# EAGLE board 13465-Spectacle_Motion_Board-panel.v10 (EAGLE 7.5.0), part 1 of 3
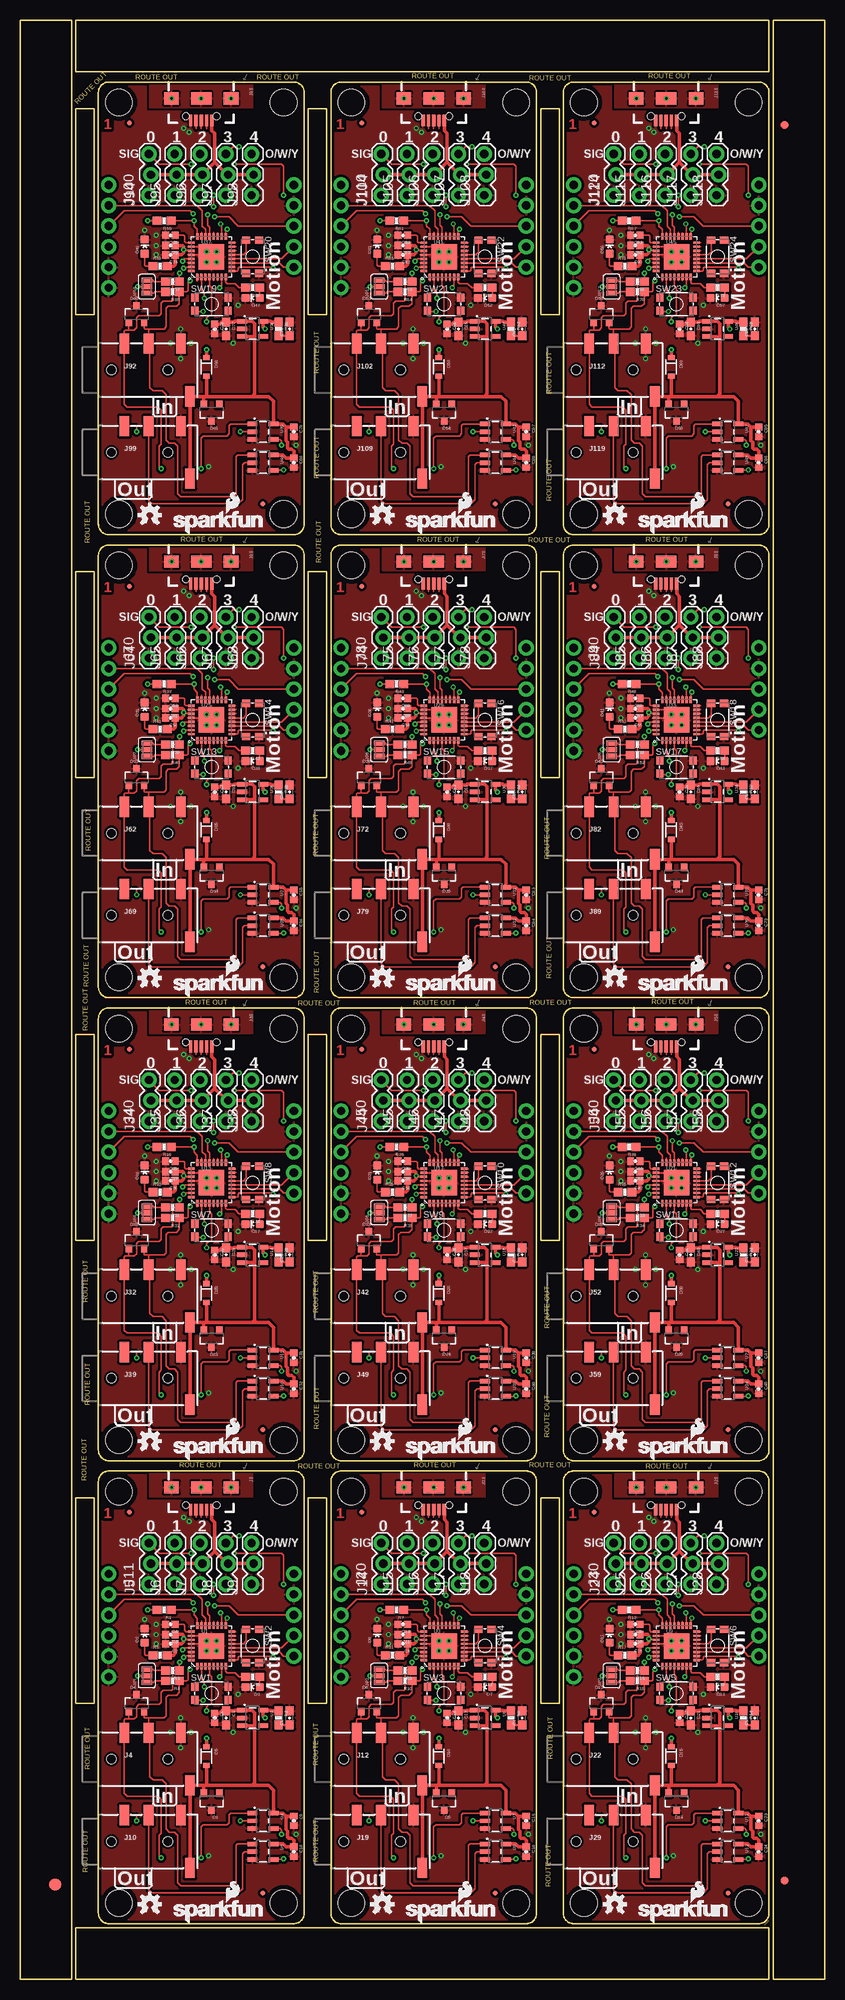
[diagram p0: board, top side]
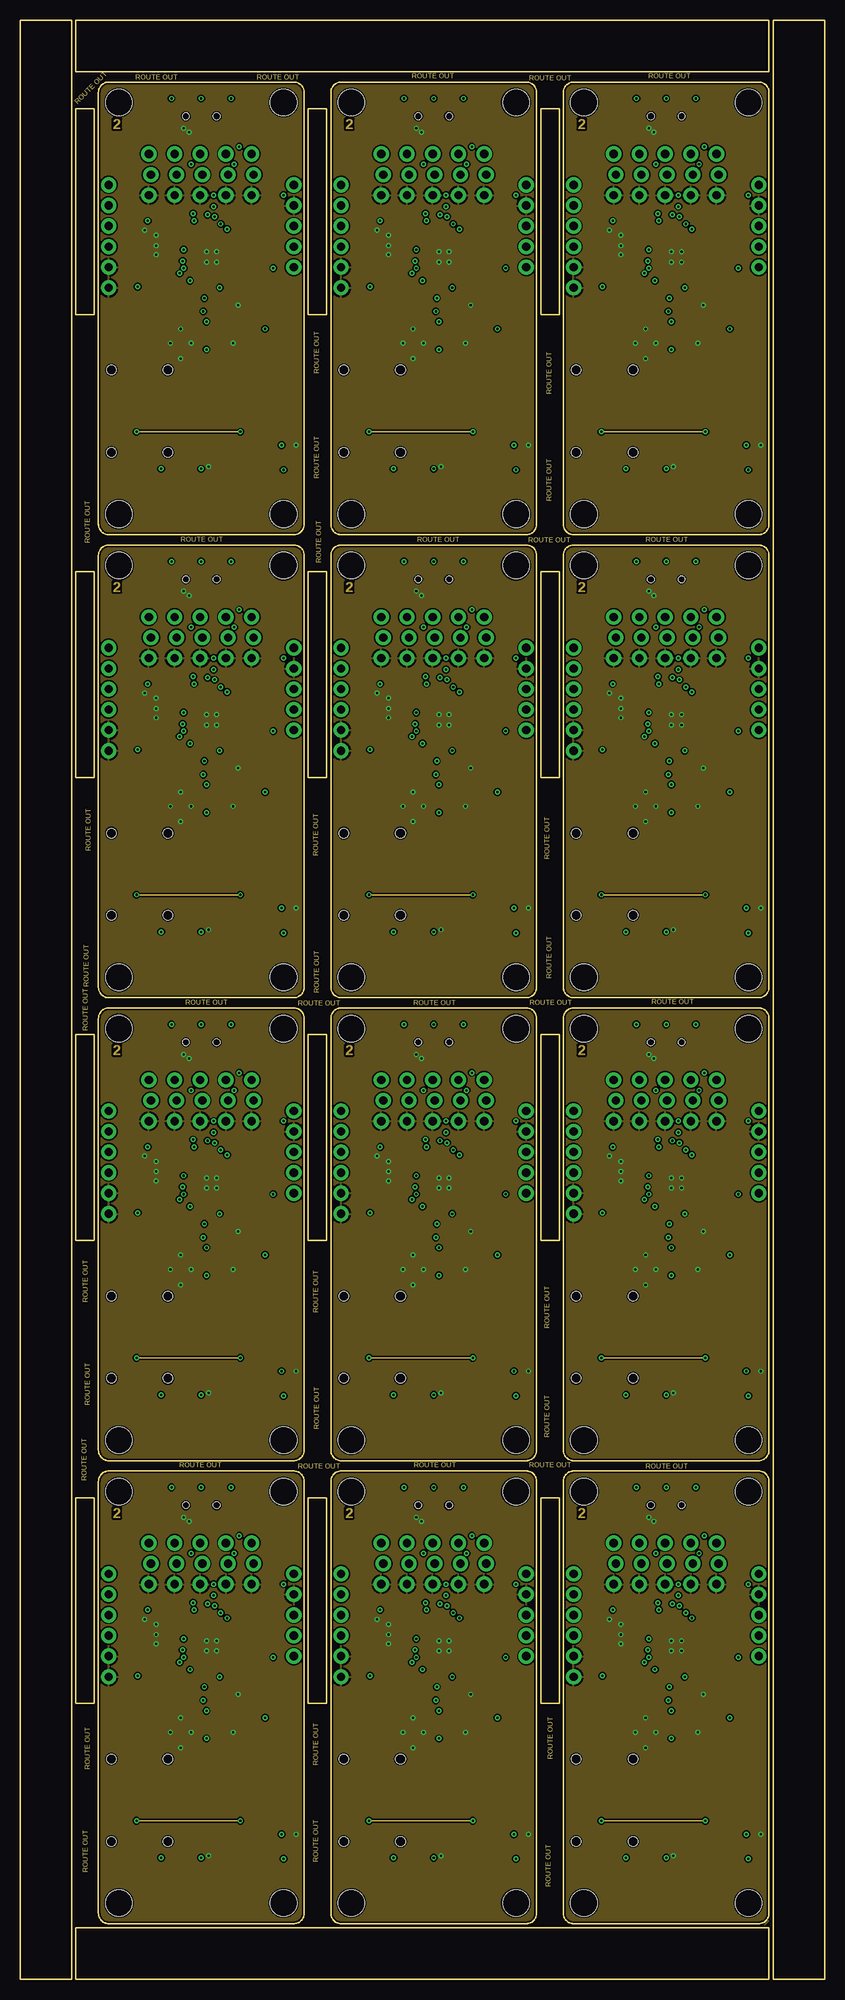
[diagram p1: board, inner layer Route2]
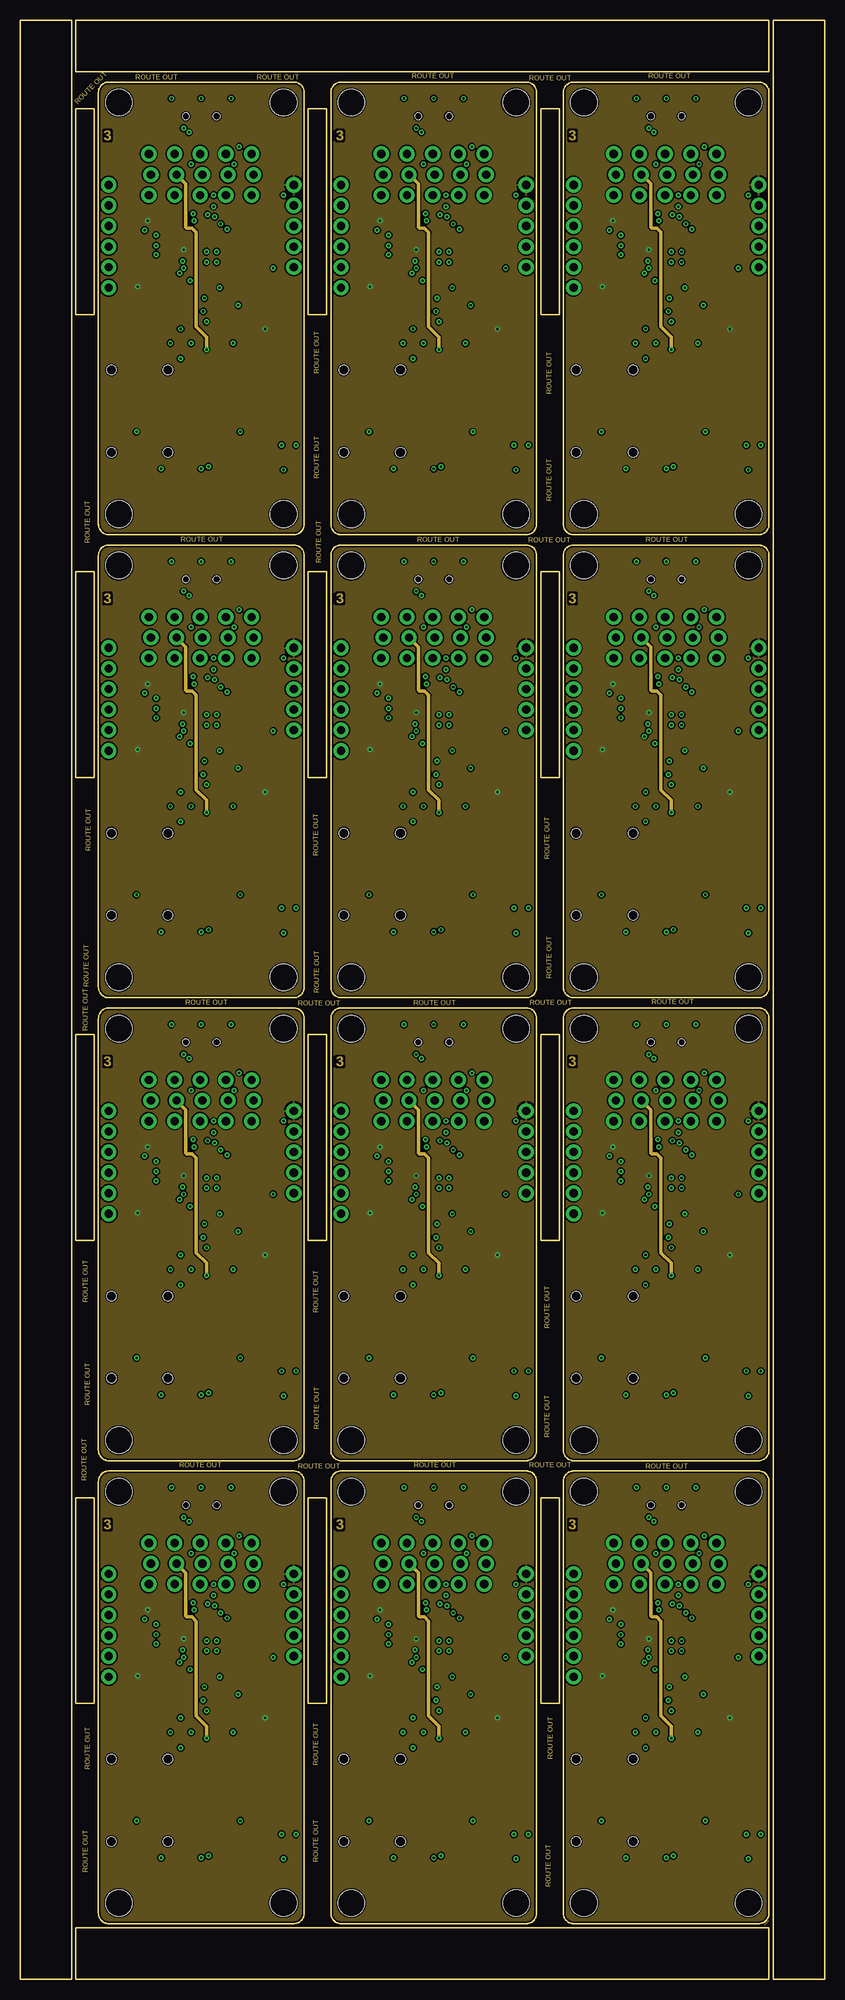
[diagram p2: board, inner layer Route15]
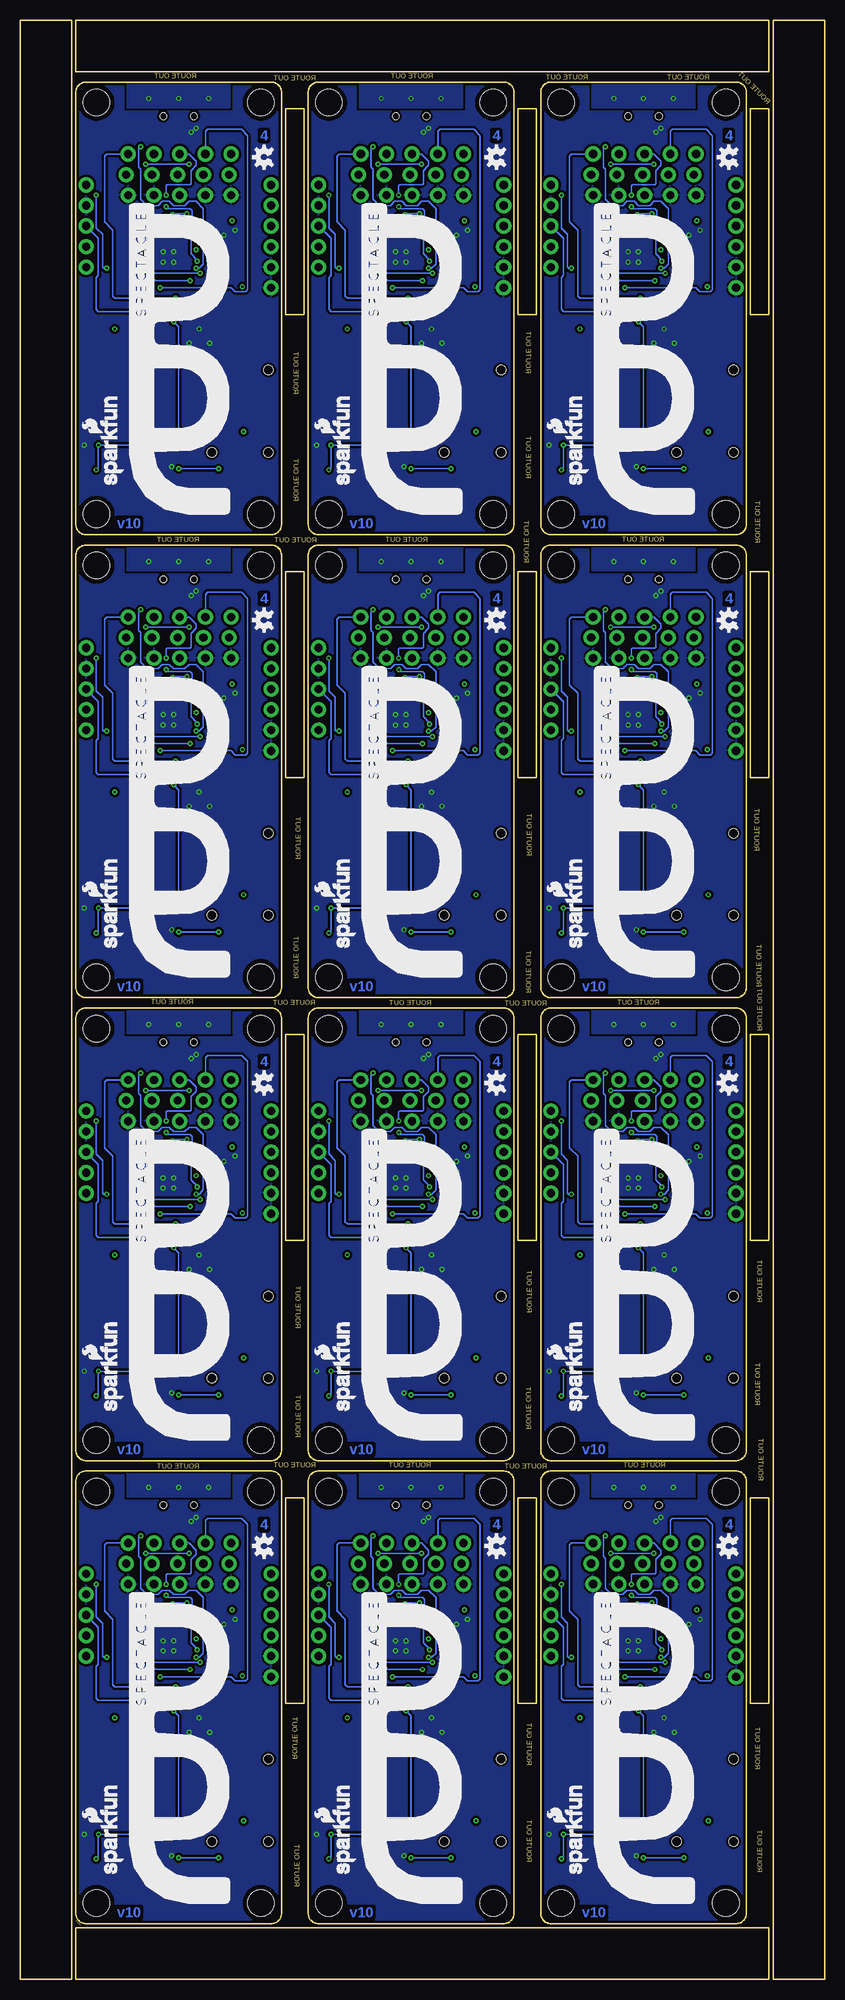
[diagram p3: board, bottom side, seen from below]

Size 99.31 x 241.81 mm. Coordinates in mm from the lower left corner, seen from the top.
Outline: 6.35,76.45 6.35,0 0,0 0,26.92
Outline: 0,24.38 0,241.81 6.35,241.81 6.35,73.91
Outline: 79.25,0 6.86,0 6.86,6.35 29.72,6.35
Outline: 27.18,6.35 92.46,6.35 92.46,0 76.71,0
Outline: 20.07,241.81 92.46,241.81 92.46,235.46 69.6,235.46
Outline: 72.14,235.46 6.86,235.46 6.86,241.81 22.61,241.81
Outline: 92.96,169.42 92.96,241.81 99.31,241.81 99.31,218.95
Outline: 99.31,221.49 99.31,0 92.96,0 92.96,171.96
Outline: 33.78,6.86 10.92,6.86 arc-90 9.65,8.13 9.65,61.47 arc-90 10.92,62.74 33.78,62.74 arc-90 35.05,61.47 35.05,8.13 arc-90 33.78,6.86
Outline: 9.14,34.04 9.14,59.44 6.86,59.44 6.86,34.04 9.14,34.04
Outline: 62.48,6.86 39.62,6.86 arc-90 38.35,8.13 38.35,61.47 arc-90 39.62,62.74 62.48,62.74 arc-90 63.75,61.47 63.75,8.13 arc-90 62.48,6.86
Outline: 37.85,34.04 37.85,59.44 35.56,59.44 35.56,34.04 37.85,34.04
Outline: 91.19,6.86 68.33,6.86 arc-90 67.06,8.13 67.06,61.47 arc-90 68.33,62.74 91.19,62.74 arc-90 92.46,61.47 92.46,8.13 arc-90 91.19,6.86
Outline: 66.55,34.04 66.55,59.44 64.26,59.44 64.26,34.04 66.55,34.04
Outline: 33.78,64.01 10.92,64.01 arc-90 9.65,65.28 9.65,118.62 arc-90 10.92,119.89 33.78,119.89 arc-90 35.05,118.62 35.05,65.28 arc-90 33.78,64.01
Outline: 9.14,91.19 9.14,116.59 6.86,116.59 6.86,91.19 9.14,91.19
Outline: 62.48,64.01 39.62,64.01 arc-90 38.35,65.28 38.35,118.62 arc-90 39.62,119.89 62.48,119.89 arc-90 63.75,118.62 63.75,65.28 arc-90 62.48,64.01
Outline: 37.85,91.19 37.85,116.59 35.56,116.59 35.56,91.19 37.85,91.19
Outline: 91.19,64.01 68.33,64.01 arc-90 67.06,65.28 67.06,118.62 arc-90 68.33,119.89 91.19,119.89 arc-90 92.46,118.62 92.46,65.28 arc-90 91.19,64.01
Outline: 66.55,91.19 66.55,116.59 64.26,116.59 64.26,91.19 66.55,91.19
Outline: 33.78,121.16 10.92,121.16 arc-90 9.65,122.43 9.65,175.77 arc-90 10.92,177.04 33.78,177.04 arc-90 35.05,175.77 35.05,122.43 arc-90 33.78,121.16
Outline: 9.14,148.34 9.14,173.74 6.86,173.74 6.86,148.34 9.14,148.34
Outline: 62.48,121.16 39.62,121.16 arc-90 38.35,122.43 38.35,175.77 arc-90 39.62,177.04 62.48,177.04 arc-90 63.75,175.77 63.75,122.43 arc-90 62.48,121.16
Outline: 37.85,148.34 37.85,173.74 35.56,173.74 35.56,148.34 37.85,148.34
Outline: 91.19,121.16 68.33,121.16 arc-90 67.06,122.43 67.06,175.77 arc-90 68.33,177.04 91.19,177.04 arc-90 92.46,175.77 92.46,122.43 arc-90 91.19,121.16
Outline: 66.55,148.34 66.55,173.74 64.26,173.74 64.26,148.34 66.55,148.34
Outline: 33.78,178.31 10.92,178.31 arc-90 9.65,179.58 9.65,232.92 arc-90 10.92,234.19 33.78,234.19 arc-90 35.05,232.92 35.05,179.58 arc-90 33.78,178.31
Outline: 9.14,205.49 9.14,230.89 6.86,230.89 6.86,205.49 9.14,205.49
Outline: 62.48,178.31 39.62,178.31 arc-90 38.35,179.58 38.35,232.92 arc-90 39.62,234.19 62.48,234.19 arc-90 63.75,232.92 63.75,179.58 arc-90 62.48,178.31
Outline: 37.85,205.49 37.85,230.89 35.56,230.89 35.56,205.49 37.85,205.49
Outline: 91.19,178.31 68.33,178.31 arc-90 67.06,179.58 67.06,232.92 arc-90 68.33,234.19 91.19,234.19 arc-90 92.46,232.92 92.46,179.58 arc-90 91.19,178.31
Outline: 66.55,205.49 66.55,230.89 64.26,230.89 64.26,205.49 66.55,205.49
Copper layers (1*2*15*16): Top 0.035559375mm / dielectric 0.47751875mm / Route2 0.035559375mm / dielectric 0.47751875mm / Route15 0.035559375mm / dielectric 0.47751875mm / Bottom 0.035559375mm
Design rules "SparkFun-4-layer-TIGHT *": minimum track width 7mil, minimum drill 10mil, track to track 7mil, track to pad 7mil, pad to pad 7mil, via to via 7mil, smd to smd 7mil, copper to edge 7mil, drill to drill 7mil, minimum pad ring 7mil, minimum via ring 7mil, stop-mask expansion 4mil, vias tented up to drill 25mil, thermal gap 10mil

## Footprints (pad centres in the part's own frame; a part is rotated, then mirrored left to right if it is on the bottom)
0603-CAP = smd 1.1 x 1: 1 -0.85,0; 2 0.85,0
0402-CAP = smd 0.85 x 0.9: 1 -0.58,0; 2 0.58,0
SOT23-3 = smd 0.8 x 0.9: 1 -0.95,-1; 2 0.95,-1; 3 0,1.1
LED-0603 = smd 1 x 1: A 0,-0.877; C 0,0.877
SOD-323 = smd 0.63 x 0.83: A 1.15,0; C -1.15,0
FIDUCIAL-1.5X3 = smd 1.5 x 1.5: 1 0,0
FIDUCIAL-1X2 = smd 1 x 1: 1 0,0
MICRO-FIDUCIAL = smd 0.635 x 0.635: 1 0,0
STAND-OFF = hole 3.302: 0,0
1X05_NO_SILK = drill 1.016 pad 1.88: 1 0,0; 2 2.54,0; 3 5.08,0; 4 7.62,0; 5 10.16,0
USB-B-MICRO-SMD_V03_RED_PASTE = smd 1.45 x 0.4: D+ 2.725,0; D- 2.725,0.65; GND 2.725,-1.3; ID 2.725,-0.65; VBUS 2.725,1.3 | smd 1.5 x 1.8: SHIELD1 0,3.685; SHIELD2 0,-3.685 | smd 1.5 x 2.5: SHIELD3 0,0 | hole 0.85: 2.2,1.9; 2.2,-1.9
AUDIO_JACK_3.5MM_TRRS_SMD_RA = smd 1.2 x 2.5: EARTH 11.3,-3.25; RING1 6.2,3.25; RING2 3.2,3.25; TIP 10.2,3.25 | hole 1.2: 1.6,0; 8.6,0
1X03_LOCK = drill 1.016 pad 1.88: 1 0,0.127; 2 2.54,-0.127; 3 5.08,0.127
1X06_NO_SILK = drill 1.016 pad 1.88: 1 0,0; 2 2.54,0; 3 5.08,0; 4 7.62,0; 5 10.16,0; 6 12.7,0
PAD-JUMPER-3-NC_BY_PASTE_YES_SILK_FULL_BOX = smd 0.635 x 1.27: 1 -0.813,0; 2 0,0; 3 0.813,0
0603-RES = smd 1.1 x 1: 1 -0.85,0; 2 0.85,0
TACTILE_SWITCH_SMD_4.6X2.8MM = smd 0.9 x 1: 1 -2.05,-0.8; 2 2.05,-0.8; 3 2.05,0.8; 4 -2.05,0.8
QFN-32 = smd 0.285 x 0.8: 1 -1.75,-2.5; 2 -1.25,-2.5; 3 -0.75,-2.5; 4 -0.25,-2.5; 5 0.25,-2.5; 6 0.75,-2.5; 7 1.25,-2.5; 8 1.75,-2.5; 17 1.75,2.5; 18 1.25,2.5; 19 0.75,2.5; 20 0.25,2.5; 21 -0.25,2.5; 22 -0.75,2.5; 23 -1.25,2.5; 24 -1.75,2.5 | smd 0.8 x 0.285: 9 2.5,-1.75; 10 2.5,-1.25; 11 2.5,-0.75; 12 2.5,-0.25; 13 2.5,0.25; 14 2.5,0.75; 15 2.5,1.25; 16 2.5,1.75; 25 -2.5,1.75; 26 -2.5,1.25; 27 -2.5,0.75; 28 -2.5,0.25; 29 -2.5,-0.25; 30 -2.5,-0.75; 31 -2.5,-1.25; 32 -2.5,-1.75 | smd 3.15 x 3.15: EP 0,0
SOT23-5 = smd 0.55 x 1.2: 1 -0.95,-1.3; 2 0,-1.3; 3 0.95,-1.3; 4 0.95,1.3; 5 -0.95,1.3

## Placement (x,y rotation side)
C1  2.2uF  [0603-CAP]  33.27,32.26 90 top
C2  1.0uF  [0402-CAP]  18.54,41.4 180 top
C3  0.1uF  [0402-CAP]  18.54,42.55 180 top
C4  0.1uF  [0402-CAP]  18.54,43.81 180 top
C5  2.2uF  [0603-CAP]  25.4,32.26 270 top
C6  0.1uF  [0402-CAP]  24,32.26 270 top
C7  2.2uF  [0603-CAP]  61.98,32.26 90 top
C8  1.0uF  [0402-CAP]  47.24,41.4 180 top
C9  0.1uF  [0402-CAP]  33.78,19.56 270 top
C10  0.1uF  [0402-CAP]  33.78,15.75 270 top
C11  0.1uF  [0402-CAP]  47.24,42.55 180 top
C12  0.1uF  [0402-CAP]  47.24,43.81 180 top
C13  2.2uF  [0603-CAP]  54.1,32.26 270 top
C14  0.1uF  [0402-CAP]  52.7,32.26 270 top
C15  0.1uF  [0402-CAP]  62.48,19.56 270 top
C16  0.1uF  [0402-CAP]  62.48,15.75 270 top
C17  2.2uF  [0603-CAP]  90.68,32.26 90 top
C18  1.0uF  [0402-CAP]  75.95,41.4 180 top
C19  0.1uF  [0402-CAP]  75.95,42.55 180 top
C20  0.1uF  [0402-CAP]  75.95,43.81 180 top
C21  2.2uF  [0603-CAP]  82.8,32.26 270 top
C22  0.1uF  [0402-CAP]  81.41,32.26 270 top
C23  0.1uF  [0402-CAP]  91.19,19.56 270 top
C24  0.1uF  [0402-CAP]  91.19,15.75 270 top
C25  2.2uF  [0603-CAP]  33.27,89.41 90 top
C26  1.0uF  [0402-CAP]  18.54,98.55 180 top
C27  0.1uF  [0402-CAP]  18.54,99.69 180 top
C28  0.1uF  [0402-CAP]  18.54,100.97 180 top
C29  2.2uF  [0603-CAP]  25.4,89.41 270 top
C30  0.1uF  [0402-CAP]  24,89.41 270 top
C31  0.1uF  [0402-CAP]  33.78,76.71 270 top
C32  0.1uF  [0402-CAP]  33.78,72.9 270 top
C33  2.2uF  [0603-CAP]  61.98,89.41 90 top
C34  1.0uF  [0402-CAP]  47.24,98.55 180 top
C35  0.1uF  [0402-CAP]  47.24,99.69 180 top
C36  0.1uF  [0402-CAP]  47.24,100.97 180 top
C37  2.2uF  [0603-CAP]  54.1,89.41 270 top
C38  0.1uF  [0402-CAP]  52.7,89.41 270 top
C39  0.1uF  [0402-CAP]  62.48,76.71 270 top
C40  0.1uF  [0402-CAP]  62.48,72.9 270 top
C41  2.2uF  [0603-CAP]  90.68,89.41 90 top
C42  1.0uF  [0402-CAP]  75.95,98.55 180 top
C43  0.1uF  [0402-CAP]  75.95,99.69 180 top
C44  0.1uF  [0402-CAP]  75.95,100.97 180 top
C45  2.2uF  [0603-CAP]  82.8,89.41 270 top
C46  0.1uF  [0402-CAP]  81.41,89.41 270 top
C47  0.1uF  [0402-CAP]  91.19,76.71 270 top
C48  0.1uF  [0402-CAP]  91.19,72.9 270 top
C49  2.2uF  [0603-CAP]  33.27,146.56 90 top
C50  1.0uF  [0402-CAP]  18.54,155.7 180 top
C51  0.1uF  [0402-CAP]  18.54,156.84 180 top
C52  0.1uF  [0402-CAP]  18.54,158.12 180 top
C53  2.2uF  [0603-CAP]  25.4,146.56 270 top
C54  0.1uF  [0402-CAP]  24,146.56 270 top
C55  0.1uF  [0402-CAP]  33.78,133.86 270 top
C56  0.1uF  [0402-CAP]  33.78,130.05 270 top
C57  2.2uF  [0603-CAP]  61.98,146.56 90 top
C58  1.0uF  [0402-CAP]  47.24,155.7 180 top
C59  0.1uF  [0402-CAP]  47.24,156.84 180 top
C60  0.1uF  [0402-CAP]  47.24,158.12 180 top
C61  2.2uF  [0603-CAP]  54.1,146.56 270 top
C62  0.1uF  [0402-CAP]  52.7,146.56 270 top
C63  0.1uF  [0402-CAP]  62.48,133.86 270 top
C64  0.1uF  [0402-CAP]  62.48,130.05 270 top
C65  2.2uF  [0603-CAP]  90.68,146.56 90 top
C66  1.0uF  [0402-CAP]  75.95,155.7 180 top
C67  0.1uF  [0402-CAP]  75.95,156.84 180 top
C68  0.1uF  [0402-CAP]  75.95,158.12 180 top
C69  2.2uF  [0603-CAP]  82.8,146.56 270 top
C70  0.1uF  [0402-CAP]  81.41,146.56 270 top
C71  0.1uF  [0402-CAP]  91.19,133.86 270 top
C72  0.1uF  [0402-CAP]  91.19,130.05 270 top
C73  2.2uF  [0603-CAP]  33.27,203.71 90 top
C74  1.0uF  [0402-CAP]  18.54,212.85 180 top
C75  0.1uF  [0402-CAP]  18.54,214 180 top
C76  0.1uF  [0402-CAP]  18.54,215.26 180 top
C77  2.2uF  [0603-CAP]  25.4,203.71 270 top
C78  0.1uF  [0402-CAP]  24,203.71 270 top
C79  0.1uF  [0402-CAP]  33.78,191.01 270 top
C80  0.1uF  [0402-CAP]  33.78,187.2 270 top
C81  2.2uF  [0603-CAP]  61.98,203.71 90 top
C82  1.0uF  [0402-CAP]  47.24,212.85 180 top
C83  0.1uF  [0402-CAP]  47.24,214 180 top
C84  0.1uF  [0402-CAP]  47.24,215.26 180 top
C85  2.2uF  [0603-CAP]  54.1,203.71 270 top
C86  0.1uF  [0402-CAP]  52.7,203.71 270 top
C87  0.1uF  [0402-CAP]  62.48,191.01 270 top
C88  0.1uF  [0402-CAP]  62.48,187.2 270 top
C89  2.2uF  [0603-CAP]  90.68,203.71 90 top
C90  1.0uF  [0402-CAP]  75.95,212.85 180 top
C91  0.1uF  [0402-CAP]  75.95,214 180 top
C92  0.1uF  [0402-CAP]  75.95,215.26 180 top
C93  2.2uF  [0603-CAP]  82.8,203.71 270 top
C94  0.1uF  [0402-CAP]  81.41,203.71 270 top
C95  0.1uF  [0402-CAP]  91.19,191.01 270 top
C96  0.1uF  [0402-CAP]  91.19,187.2 270 top
D1  PESD1CAN  [SOT23-3]  23.62,21.97 180 top
D2  RED  [LED-0603]  15.37,42.42 0 top
D3  Yellow  [LED-0603]  28.7,36.07 90 top
D4  PESD1CAN  [SOT23-3]  14.35,34.04 0 top
D5  BAT20J  [SOD-323]  22.99,27.56 270 top
D6  RED  [LED-0603]  44.07,42.42 0 top
D7  Yellow  [LED-0603]  57.4,36.07 90 top
D8  PESD1CAN  [SOT23-3]  43.05,34.04 0 top
D9  PESD1CAN  [SOT23-3]  52.32,21.97 180 top
D10  BAT20J  [SOD-323]  51.69,27.56 270 top
D11  RED  [LED-0603]  72.77,42.42 0 top
D12  Yellow  [LED-0603]  86.11,36.07 90 top
D13  PESD1CAN  [SOT23-3]  71.75,34.04 0 top
D14  PESD1CAN  [SOT23-3]  81.03,21.97 180 top
D15  BAT20J  [SOD-323]  80.39,27.56 270 top
D16  RED  [LED-0603]  15.37,99.57 0 top
D17  Yellow  [LED-0603]  28.7,93.22 90 top
D18  PESD1CAN  [SOT23-3]  14.35,91.19 0 top
D19  PESD1CAN  [SOT23-3]  23.62,79.12 180 top
D20  BAT20J  [SOD-323]  22.99,84.71 270 top
D21  RED  [LED-0603]  44.07,99.57 0 top
D22  Yellow  [LED-0603]  57.4,93.22 90 top
D23  PESD1CAN  [SOT23-3]  43.05,91.19 0 top
D24  PESD1CAN  [SOT23-3]  52.32,79.12 180 top
D25  BAT20J  [SOD-323]  51.69,84.71 270 top
D26  RED  [LED-0603]  72.77,99.57 0 top
D27  Yellow  [LED-0603]  86.11,93.22 90 top
D28  PESD1CAN  [SOT23-3]  71.75,91.19 0 top
D29  PESD1CAN  [SOT23-3]  81.03,79.12 180 top
D30  BAT20J  [SOD-323]  80.39,84.71 270 top
D31  RED  [LED-0603]  15.37,156.72 0 top
D32  Yellow  [LED-0603]  28.7,150.37 90 top
D33  PESD1CAN  [SOT23-3]  14.35,148.34 0 top
D34  PESD1CAN  [SOT23-3]  23.62,136.27 180 top
D35  BAT20J  [SOD-323]  22.99,141.86 270 top
D36  RED  [LED-0603]  44.07,156.72 0 top
D37  Yellow  [LED-0603]  57.4,150.37 90 top
D38  PESD1CAN  [SOT23-3]  43.05,148.34 0 top
D39  PESD1CAN  [SOT23-3]  52.32,136.27 180 top
D40  BAT20J  [SOD-323]  51.69,141.86 270 top
D41  RED  [LED-0603]  72.77,156.72 0 top
D42  Yellow  [LED-0603]  86.11,150.37 90 top
D43  PESD1CAN  [SOT23-3]  71.75,148.34 0 top
D44  PESD1CAN  [SOT23-3]  81.03,136.27 180 top
D45  BAT20J  [SOD-323]  80.39,141.86 270 top
D46  RED  [LED-0603]  15.37,213.87 0 top
D47  Yellow  [LED-0603]  28.7,207.52 90 top
D48  PESD1CAN  [SOT23-3]  14.35,205.49 0 top
D49  PESD1CAN  [SOT23-3]  23.62,193.42 180 top
D50  BAT20J  [SOD-323]  22.99,199.01 270 top
D51  RED  [LED-0603]  44.07,213.87 0 top
D52  Yellow  [LED-0603]  57.4,207.52 90 top
D53  PESD1CAN  [SOT23-3]  43.05,205.49 0 top
D54  PESD1CAN  [SOT23-3]  52.32,193.42 180 top
D55  BAT20J  [SOD-323]  51.69,199.01 270 top
D56  RED  [LED-0603]  72.77,213.87 0 top
D57  Yellow  [LED-0603]  86.11,207.52 90 top
D58  PESD1CAN  [SOT23-3]  71.75,205.49 0 top
D59  PESD1CAN  [SOT23-3]  81.03,193.42 180 top
D60  BAT20J  [SOD-323]  80.39,199.01 270 top
E$1  [FIDUCIAL-1.5X3]  4.32,11.68 0 top
E$7  [FIDUCIAL-1X2]  94.36,228.85 180 top
E$8  [FIDUCIAL-1X2]  94.36,12.19 0 top
FD1  FIDUCIALUFIDUCIAL  [MICRO-FIDUCIAL]  29.97,10.67 0 top
FD2  FIDUCIALUFIDUCIAL  [MICRO-FIDUCIAL]  13.46,57.66 0 top
FD3  FIDUCIALUFIDUCIAL  [MICRO-FIDUCIAL]  58.67,10.67 0 top
FD4  FIDUCIALUFIDUCIAL  [MICRO-FIDUCIAL]  42.16,57.66 0 top
FD5  FIDUCIALUFIDUCIAL  [MICRO-FIDUCIAL]  87.38,10.67 0 top
FD6  FIDUCIALUFIDUCIAL  [MICRO-FIDUCIAL]  70.87,57.66 0 top
FD7  FIDUCIALUFIDUCIAL  [MICRO-FIDUCIAL]  29.97,67.82 0 top
FD8  FIDUCIALUFIDUCIAL  [MICRO-FIDUCIAL]  13.46,114.81 0 top
FD9  FIDUCIALUFIDUCIAL  [MICRO-FIDUCIAL]  58.67,67.82 0 top
FD10  FIDUCIALUFIDUCIAL  [MICRO-FIDUCIAL]  42.16,114.81 0 top
FD11  FIDUCIALUFIDUCIAL  [MICRO-FIDUCIAL]  87.38,67.82 0 top
FD12  FIDUCIALUFIDUCIAL  [MICRO-FIDUCIAL]  70.87,114.81 0 top
FD13  FIDUCIALUFIDUCIAL  [MICRO-FIDUCIAL]  29.97,124.97 0 top
FD14  FIDUCIALUFIDUCIAL  [MICRO-FIDUCIAL]  13.46,171.96 0 top
FD15  FIDUCIALUFIDUCIAL  [MICRO-FIDUCIAL]  58.67,124.97 0 top
FD16  FIDUCIALUFIDUCIAL  [MICRO-FIDUCIAL]  42.16,171.96 0 top
FD17  FIDUCIALUFIDUCIAL  [MICRO-FIDUCIAL]  87.38,124.97 0 top
FD18  FIDUCIALUFIDUCIAL  [MICRO-FIDUCIAL]  70.87,171.96 0 top
FD19  FIDUCIALUFIDUCIAL  [MICRO-FIDUCIAL]  29.97,182.12 0 top
FD20  FIDUCIALUFIDUCIAL  [MICRO-FIDUCIAL]  13.46,229.11 0 top
FD21  FIDUCIALUFIDUCIAL  [MICRO-FIDUCIAL]  58.67,182.12 0 top
FD22  FIDUCIALUFIDUCIAL  [MICRO-FIDUCIAL]  42.16,229.11 0 top
FD23  FIDUCIALUFIDUCIAL  [MICRO-FIDUCIAL]  87.38,182.12 0 top
FD24  FIDUCIALUFIDUCIAL  [MICRO-FIDUCIAL]  70.87,229.11 0 top
H1  STAND-OFF  [STAND-OFF]  32.51,60.2 0 top
H2  STAND-OFF  [STAND-OFF]  12.19,60.2 0 top
H3  STAND-OFF  [STAND-OFF]  32.51,9.4 0 top
H4  STAND-OFF  [STAND-OFF]  12.19,9.4 0 top
H5  STAND-OFF  [STAND-OFF]  61.21,60.2 0 top
H6  STAND-OFF  [STAND-OFF]  40.89,60.2 0 top
H7  STAND-OFF  [STAND-OFF]  61.21,9.4 0 top
H8  STAND-OFF  [STAND-OFF]  40.89,9.4 0 top
H9  STAND-OFF  [STAND-OFF]  89.92,60.2 0 top
H10  STAND-OFF  [STAND-OFF]  69.6,60.2 0 top
H11  STAND-OFF  [STAND-OFF]  89.92,9.4 0 top
H12  STAND-OFF  [STAND-OFF]  69.6,9.4 0 top
H13  STAND-OFF  [STAND-OFF]  32.51,117.35 0 top
H14  STAND-OFF  [STAND-OFF]  12.19,117.35 0 top
H15  STAND-OFF  [STAND-OFF]  32.51,66.55 0 top
H16  STAND-OFF  [STAND-OFF]  12.19,66.55 0 top
H17  STAND-OFF  [STAND-OFF]  61.21,117.35 0 top
H18  STAND-OFF  [STAND-OFF]  40.89,117.35 0 top
H19  STAND-OFF  [STAND-OFF]  61.21,66.55 0 top
H20  STAND-OFF  [STAND-OFF]  40.89,66.55 0 top
H21  STAND-OFF  [STAND-OFF]  89.92,117.35 0 top
H22  STAND-OFF  [STAND-OFF]  69.6,117.35 0 top
H23  STAND-OFF  [STAND-OFF]  89.92,66.55 0 top
H24  STAND-OFF  [STAND-OFF]  69.6,66.55 0 top
H25  STAND-OFF  [STAND-OFF]  32.51,174.5 0 top
H26  STAND-OFF  [STAND-OFF]  12.19,174.5 0 top
H27  STAND-OFF  [STAND-OFF]  32.51,123.7 0 top
H28  STAND-OFF  [STAND-OFF]  12.19,123.7 0 top
H29  STAND-OFF  [STAND-OFF]  61.21,174.5 0 top
H30  STAND-OFF  [STAND-OFF]  40.89,174.5 0 top
H31  STAND-OFF  [STAND-OFF]  61.21,123.7 0 top
H32  STAND-OFF  [STAND-OFF]  40.89,123.7 0 top
H33  STAND-OFF  [STAND-OFF]  89.92,174.5 0 top
H34  STAND-OFF  [STAND-OFF]  69.6,174.5 0 top
H35  STAND-OFF  [STAND-OFF]  89.92,123.7 0 top
H36  STAND-OFF  [STAND-OFF]  69.6,123.7 0 top
H37  STAND-OFF  [STAND-OFF]  32.51,231.65 0 top
H38  STAND-OFF  [STAND-OFF]  12.19,231.65 0 top
H39  STAND-OFF  [STAND-OFF]  32.51,180.85 0 top
H40  STAND-OFF  [STAND-OFF]  12.19,180.85 0 top
H41  STAND-OFF  [STAND-OFF]  61.21,231.65 0 top
H42  STAND-OFF  [STAND-OFF]  40.89,231.65 0 top
H43  STAND-OFF  [STAND-OFF]  61.21,180.85 0 top
H44  STAND-OFF  [STAND-OFF]  40.89,180.85 0 top
H45  STAND-OFF  [STAND-OFF]  89.92,231.65 0 top
H46  STAND-OFF  [STAND-OFF]  69.6,231.65 0 top
H47  STAND-OFF  [STAND-OFF]  89.92,180.85 0 top
H48  STAND-OFF  [STAND-OFF]  69.6,180.85 0 top
J1  [1X05_NO_SILK]  62.48,50.04 270 top
J2  [1X05_NO_SILK]  33.78,50.04 270 top
J3  USB-MICROB  [USB-B-MICRO-SMD_V03_RED_PASTE]  22.35,60.71 270 top
J4  TRRS_3.5mm  [AUDIO_JACK_3.5MM_TRRS_SMD_RA]  9.65,27.18 0 top
J5  [1X03_LOCK]  16,48.77 90 top
J6  [1X03_LOCK]  19.18,48.77 90 top
J7  [1X03_LOCK]  22.35,48.77 90 top
J8  [1X03_LOCK]  25.53,48.77 90 top
J9  [1X03_LOCK]  28.7,48.77 90 top
J10  TRRS_3.5mm  [AUDIO_JACK_3.5MM_TRRS_SMD_RA]  9.65,17.02 0 top
J11  [1X06_NO_SILK]  10.92,50.04 270 top
J12  TRRS_3.5mm  [AUDIO_JACK_3.5MM_TRRS_SMD_RA]  38.35,27.18 0 top
J13  USB-MICROB  [USB-B-MICRO-SMD_V03_RED_PASTE]  51.05,60.71 270 top
J14  [1X03_LOCK]  44.7,48.77 90 top
J15  [1X03_LOCK]  47.88,48.77 90 top
J16  [1X03_LOCK]  51.05,48.77 90 top
J17  [1X03_LOCK]  54.23,48.77 90 top
J18  [1X03_LOCK]  57.4,48.77 90 top
J19  TRRS_3.5mm  [AUDIO_JACK_3.5MM_TRRS_SMD_RA]  38.35,17.02 0 top
J20  [1X06_NO_SILK]  39.62,50.04 270 top
J21  [1X05_NO_SILK]  91.19,50.04 270 top
J22  TRRS_3.5mm  [AUDIO_JACK_3.5MM_TRRS_SMD_RA]  67.06,27.18 0 top
J23  USB-MICROB  [USB-B-MICRO-SMD_V03_RED_PASTE]  79.76,60.71 270 top
J24  [1X03_LOCK]  73.41,48.77 90 top
J25  [1X03_LOCK]  76.58,48.77 90 top
J26  [1X03_LOCK]  79.76,48.77 90 top
J27  [1X03_LOCK]  82.93,48.77 90 top
J28  [1X03_LOCK]  86.11,48.77 90 top
J29  TRRS_3.5mm  [AUDIO_JACK_3.5MM_TRRS_SMD_RA]  67.06,17.02 0 top
J30  [1X06_NO_SILK]  68.33,50.04 270 top
J31  [1X05_NO_SILK]  33.78,107.19 270 top
J32  TRRS_3.5mm  [AUDIO_JACK_3.5MM_TRRS_SMD_RA]  9.65,84.33 0 top
J33  USB-MICROB  [USB-B-MICRO-SMD_V03_RED_PASTE]  22.35,117.86 270 top
J34  [1X03_LOCK]  16,105.92 90 top
J35  [1X03_LOCK]  19.18,105.92 90 top
J36  [1X03_LOCK]  22.35,105.92 90 top
J37  [1X03_LOCK]  25.53,105.92 90 top
J38  [1X03_LOCK]  28.7,105.92 90 top
J39  TRRS_3.5mm  [AUDIO_JACK_3.5MM_TRRS_SMD_RA]  9.65,74.17 0 top
J40  [1X06_NO_SILK]  10.92,107.19 270 top
J41  [1X05_NO_SILK]  62.48,107.19 270 top
J42  TRRS_3.5mm  [AUDIO_JACK_3.5MM_TRRS_SMD_RA]  38.35,84.33 0 top
J43  USB-MICROB  [USB-B-MICRO-SMD_V03_RED_PASTE]  51.05,117.86 270 top
J44  [1X03_LOCK]  44.7,105.92 90 top
J45  [1X03_LOCK]  47.88,105.92 90 top
J46  [1X03_LOCK]  51.05,105.92 90 top
J47  [1X03_LOCK]  54.23,105.92 90 top
J48  [1X03_LOCK]  57.4,105.92 90 top
J49  TRRS_3.5mm  [AUDIO_JACK_3.5MM_TRRS_SMD_RA]  38.35,74.17 0 top
J50  [1X06_NO_SILK]  39.62,107.19 270 top
J51  [1X05_NO_SILK]  91.19,107.19 270 top
J52  TRRS_3.5mm  [AUDIO_JACK_3.5MM_TRRS_SMD_RA]  67.06,84.33 0 top
J53  USB-MICROB  [USB-B-MICRO-SMD_V03_RED_PASTE]  79.76,117.86 270 top
J54  [1X03_LOCK]  73.41,105.92 90 top
J55  [1X03_LOCK]  76.58,105.92 90 top
J56  [1X03_LOCK]  79.76,105.92 90 top
J57  [1X03_LOCK]  82.93,105.92 90 top
J58  [1X03_LOCK]  86.11,105.92 90 top
J59  TRRS_3.5mm  [AUDIO_JACK_3.5MM_TRRS_SMD_RA]  67.06,74.17 0 top
J60  [1X06_NO_SILK]  68.33,107.19 270 top
J61  [1X05_NO_SILK]  33.78,164.34 270 top
J62  TRRS_3.5mm  [AUDIO_JACK_3.5MM_TRRS_SMD_RA]  9.65,141.48 0 top
J63  USB-MICROB  [USB-B-MICRO-SMD_V03_RED_PASTE]  22.35,175.01 270 top
J64  [1X03_LOCK]  16,163.07 90 top
J65  [1X03_LOCK]  19.18,163.07 90 top
J66  [1X03_LOCK]  22.35,163.07 90 top
J67  [1X03_LOCK]  25.53,163.07 90 top
J68  [1X03_LOCK]  28.7,163.07 90 top
J69  TRRS_3.5mm  [AUDIO_JACK_3.5MM_TRRS_SMD_RA]  9.65,131.32 0 top
J70  [1X06_NO_SILK]  10.92,164.34 270 top
J71  [1X05_NO_SILK]  62.48,164.34 270 top
J72  TRRS_3.5mm  [AUDIO_JACK_3.5MM_TRRS_SMD_RA]  38.35,141.48 0 top
J73  USB-MICROB  [USB-B-MICRO-SMD_V03_RED_PASTE]  51.05,175.01 270 top
J74  [1X03_LOCK]  44.7,163.07 90 top
J75  [1X03_LOCK]  47.88,163.07 90 top
J76  [1X03_LOCK]  51.05,163.07 90 top
J77  [1X03_LOCK]  54.23,163.07 90 top
J78  [1X03_LOCK]  57.4,163.07 90 top
J79  TRRS_3.5mm  [AUDIO_JACK_3.5MM_TRRS_SMD_RA]  38.35,131.32 0 top
J80  [1X06_NO_SILK]  39.62,164.34 270 top
J81  [1X05_NO_SILK]  91.19,164.34 270 top
J82  TRRS_3.5mm  [AUDIO_JACK_3.5MM_TRRS_SMD_RA]  67.06,141.48 0 top
J83  USB-MICROB  [USB-B-MICRO-SMD_V03_RED_PASTE]  79.76,175.01 270 top
J84  [1X03_LOCK]  73.41,163.07 90 top
J85  [1X03_LOCK]  76.58,163.07 90 top
J86  [1X03_LOCK]  79.76,163.07 90 top
J87  [1X03_LOCK]  82.93,163.07 90 top
J88  [1X03_LOCK]  86.11,163.07 90 top
J89  TRRS_3.5mm  [AUDIO_JACK_3.5MM_TRRS_SMD_RA]  67.06,131.32 0 top
J90  [1X06_NO_SILK]  68.33,164.34 270 top
J91  [1X05_NO_SILK]  33.78,221.49 270 top
J92  TRRS_3.5mm  [AUDIO_JACK_3.5MM_TRRS_SMD_RA]  9.65,198.63 0 top
J93  USB-MICROB  [USB-B-MICRO-SMD_V03_RED_PASTE]  22.35,232.16 270 top
J94  [1X03_LOCK]  16,220.22 90 top
J95  [1X03_LOCK]  19.18,220.22 90 top
J96  [1X03_LOCK]  22.35,220.22 90 top
J97  [1X03_LOCK]  25.53,220.22 90 top
J98  [1X03_LOCK]  28.7,220.22 90 top
J99  TRRS_3.5mm  [AUDIO_JACK_3.5MM_TRRS_SMD_RA]  9.65,188.47 0 top
J100  [1X06_NO_SILK]  10.92,221.49 270 top
J101  [1X05_NO_SILK]  62.48,221.49 270 top
J102  TRRS_3.5mm  [AUDIO_JACK_3.5MM_TRRS_SMD_RA]  38.35,198.63 0 top
J103  USB-MICROB  [USB-B-MICRO-SMD_V03_RED_PASTE]  51.05,232.16 270 top
J104  [1X03_LOCK]  44.7,220.22 90 top
J105  [1X03_LOCK]  47.88,220.22 90 top
J106  [1X03_LOCK]  51.05,220.22 90 top
J107  [1X03_LOCK]  54.23,220.22 90 top
J108  [1X03_LOCK]  57.4,220.22 90 top
J109  TRRS_3.5mm  [AUDIO_JACK_3.5MM_TRRS_SMD_RA]  38.35,188.47 0 top
J110  [1X06_NO_SILK]  39.62,221.49 270 top
J111  [1X05_NO_SILK]  91.19,221.49 270 top
J112  TRRS_3.5mm  [AUDIO_JACK_3.5MM_TRRS_SMD_RA]  67.06,198.63 0 top
J113  USB-MICROB  [USB-B-MICRO-SMD_V03_RED_PASTE]  79.76,232.16 270 top
J114  [1X03_LOCK]  73.41,220.22 90 top
J115  [1X03_LOCK]  76.58,220.22 90 top
J116  [1X03_LOCK]  79.76,220.22 90 top
J117  [1X03_LOCK]  82.93,220.22 90 top
J118  [1X03_LOCK]  86.11,220.22 90 top
J119  TRRS_3.5mm  [AUDIO_JACK_3.5MM_TRRS_SMD_RA]  67.06,188.47 0 top
J120  [1X06_NO_SILK]  68.33,221.49 270 top
JP1  JUMPER-PAD-3-NC_BY_PASTE  [PAD-JUMPER-3-NC_BY_PASTE_YES_SILK_FULL_BOX]  15.63,37.47 90 top
JP2  JUMPER-PAD-3-NC_BY_PASTE  [PAD-JUMPER-3-NC_BY_PASTE_YES_SILK_FULL_BOX]  44.33,37.47 90 top
JP3  JUMPER-PAD-3-NC_BY_PASTE  [PAD-JUMPER-3-NC_BY_PASTE_YES_SILK_FULL_BOX]  73.03,37.47 90 top
JP4  JUMPER-PAD-3-NC_BY_PASTE  [PAD-JUMPER-3-NC_BY_PASTE_YES_SILK_FULL_BOX]  15.63,94.61 90 top
JP5  JUMPER-PAD-3-NC_BY_PASTE  [PAD-JUMPER-3-NC_BY_PASTE_YES_SILK_FULL_BOX]  44.33,94.61 90 top
JP6  JUMPER-PAD-3-NC_BY_PASTE  [PAD-JUMPER-3-NC_BY_PASTE_YES_SILK_FULL_BOX]  73.03,94.61 90 top
JP7  JUMPER-PAD-3-NC_BY_PASTE  [PAD-JUMPER-3-NC_BY_PASTE_YES_SILK_FULL_BOX]  15.63,151.76 90 top
JP8  JUMPER-PAD-3-NC_BY_PASTE  [PAD-JUMPER-3-NC_BY_PASTE_YES_SILK_FULL_BOX]  44.33,151.76 90 top
JP9  JUMPER-PAD-3-NC_BY_PASTE  [PAD-JUMPER-3-NC_BY_PASTE_YES_SILK_FULL_BOX]  73.03,151.76 90 top
JP10  JUMPER-PAD-3-NC_BY_PASTE  [PAD-JUMPER-3-NC_BY_PASTE_YES_SILK_FULL_BOX]  15.63,208.91 90 top
JP11  JUMPER-PAD-3-NC_BY_PASTE  [PAD-JUMPER-3-NC_BY_PASTE_YES_SILK_FULL_BOX]  44.33,208.91 90 top
JP12  JUMPER-PAD-3-NC_BY_PASTE  [PAD-JUMPER-3-NC_BY_PASTE_YES_SILK_FULL_BOX]  73.03,208.91 90 top
LOGO1  OSHW-LOGOS  [OSHW-LOGO-S]  16,9.27 0 top
LOGO2  SFE_LOGO_NAME_FLAME.1_INCH  [SFE_LOGO_NAME_FLAME_.1]  18.54,6.86 0 top
LOGO3  SFE_LOGO_NAME_FLAME.1_INCH  [SFE_LOGO_NAME_FLAME_.1]  29.08,12.57 90 bottom
LOGO4  OSHW-LOGOS  [OSHW-LOGO-S]  11.81,53.47 90 bottom
LOGO5  OSHW-LOGOS  [OSHW-LOGO-S]  44.7,9.27 0 top
LOGO6  SFE_LOGO_NAME_FLAME.1_INCH  [SFE_LOGO_NAME_FLAME_.1]  47.24,6.86 0 top
LOGO7  SFE_LOGO_NAME_FLAME.1_INCH  [SFE_LOGO_NAME_FLAME_.1]  57.78,12.57 90 bottom
LOGO8  OSHW-LOGOS  [OSHW-LOGO-S]  40.51,53.47 90 bottom
LOGO9  OSHW-LOGOS  [OSHW-LOGO-S]  73.41,9.27 0 top
LOGO10  SFE_LOGO_NAME_FLAME.1_INCH  [SFE_LOGO_NAME_FLAME_.1]  75.95,6.86 0 top
LOGO11  SFE_LOGO_NAME_FLAME.1_INCH  [SFE_LOGO_NAME_FLAME_.1]  86.49,12.57 90 bottom
LOGO12  OSHW-LOGOS  [OSHW-LOGO-S]  69.22,53.47 90 bottom
LOGO13  OSHW-LOGOS  [OSHW-LOGO-S]  16,66.42 0 top
LOGO14  SFE_LOGO_NAME_FLAME.1_INCH  [SFE_LOGO_NAME_FLAME_.1]  18.54,64.01 0 top
LOGO15  SFE_LOGO_NAME_FLAME.1_INCH  [SFE_LOGO_NAME_FLAME_.1]  29.08,69.72 90 bottom
LOGO16  OSHW-LOGOS  [OSHW-LOGO-S]  11.81,110.62 90 bottom
LOGO17  OSHW-LOGOS  [OSHW-LOGO-S]  44.7,66.42 0 top
LOGO18  SFE_LOGO_NAME_FLAME.1_INCH  [SFE_LOGO_NAME_FLAME_.1]  47.24,64.01 0 top
LOGO19  SFE_LOGO_NAME_FLAME.1_INCH  [SFE_LOGO_NAME_FLAME_.1]  57.78,69.72 90 bottom
LOGO20  OSHW-LOGOS  [OSHW-LOGO-S]  40.51,110.62 90 bottom
LOGO21  OSHW-LOGOS  [OSHW-LOGO-S]  73.41,66.42 0 top
LOGO22  SFE_LOGO_NAME_FLAME.1_INCH  [SFE_LOGO_NAME_FLAME_.1]  75.95,64.01 0 top
LOGO23  SFE_LOGO_NAME_FLAME.1_INCH  [SFE_LOGO_NAME_FLAME_.1]  86.49,69.72 90 bottom
LOGO24  OSHW-LOGOS  [OSHW-LOGO-S]  69.22,110.62 90 bottom
LOGO25  OSHW-LOGOS  [OSHW-LOGO-S]  16,123.57 0 top
LOGO26  SFE_LOGO_NAME_FLAME.1_INCH  [SFE_LOGO_NAME_FLAME_.1]  18.54,121.16 0 top
LOGO27  SFE_LOGO_NAME_FLAME.1_INCH  [SFE_LOGO_NAME_FLAME_.1]  29.08,126.87 90 bottom
LOGO28  OSHW-LOGOS  [OSHW-LOGO-S]  11.81,167.77 90 bottom
LOGO29  OSHW-LOGOS  [OSHW-LOGO-S]  44.7,123.57 0 top
LOGO30  SFE_LOGO_NAME_FLAME.1_INCH  [SFE_LOGO_NAME_FLAME_.1]  47.24,121.16 0 top
LOGO31  SFE_LOGO_NAME_FLAME.1_INCH  [SFE_LOGO_NAME_FLAME_.1]  57.78,126.87 90 bottom
LOGO32  OSHW-LOGOS  [OSHW-LOGO-S]  40.51,167.77 90 bottom
LOGO33  OSHW-LOGOS  [OSHW-LOGO-S]  73.41,123.57 0 top
LOGO34  SFE_LOGO_NAME_FLAME.1_INCH  [SFE_LOGO_NAME_FLAME_.1]  75.95,121.16 0 top
LOGO35  SFE_LOGO_NAME_FLAME.1_INCH  [SFE_LOGO_NAME_FLAME_.1]  86.49,126.87 90 bottom
LOGO36  OSHW-LOGOS  [OSHW-LOGO-S]  69.22,167.77 90 bottom
LOGO37  OSHW-LOGOS  [OSHW-LOGO-S]  16,180.72 0 top
LOGO38  SFE_LOGO_NAME_FLAME.1_INCH  [SFE_LOGO_NAME_FLAME_.1]  18.54,178.31 0 top
LOGO39  SFE_LOGO_NAME_FLAME.1_INCH  [SFE_LOGO_NAME_FLAME_.1]  29.08,184.02 90 bottom
LOGO40  OSHW-LOGOS  [OSHW-LOGO-S]  11.81,224.92 90 bottom
LOGO41  OSHW-LOGOS  [OSHW-LOGO-S]  44.7,180.72 0 top
LOGO42  SFE_LOGO_NAME_FLAME.1_INCH  [SFE_LOGO_NAME_FLAME_.1]  47.24,178.31 0 top
LOGO43  SFE_LOGO_NAME_FLAME.1_INCH  [SFE_LOGO_NAME_FLAME_.1]  57.78,184.02 90 bottom
LOGO44  OSHW-LOGOS  [OSHW-LOGO-S]  40.51,224.92 90 bottom
LOGO45  OSHW-LOGOS  [OSHW-LOGO-S]  73.41,180.72 0 top
LOGO46  SFE_LOGO_NAME_FLAME.1_INCH  [SFE_LOGO_NAME_FLAME_.1]  75.95,178.31 0 top
LOGO47  SFE_LOGO_NAME_FLAME.1_INCH  [SFE_LOGO_NAME_FLAME_.1]  86.49,184.02 90 bottom
LOGO48  OSHW-LOGOS  [OSHW-LOGO-S]  69.22,224.92 90 bottom
R1  10K  [0603-RES]  17.78,45.59 180 top
R2  0.27  [0603-RES]  31.88,32.26 270 top
R3  4.7K  [0603-RES]  18.8,38.1 180 top
R4  4.7K  [0603-RES]  18.8,36.83 180 top
R5  1K  [0603-RES]  17.27,40.01 0 top
R6  1K  [0603-RES]  28.7,37.34 180 top
R7  10K  [0603-RES]  46.48,45.59 180 top
R8  0.27  [0603-RES]  60.58,32.26 270 top
R9  4.7K  [0603-RES]  47.5,38.1 180 top
R10  4.7K  [0603-RES]  47.5,36.83 180 top
R11  1K  [0603-RES]  45.97,40.01 0 top
R12  1K  [0603-RES]  57.4,37.34 180 top
R13  10K  [0603-RES]  75.18,45.59 180 top
R14  0.27  [0603-RES]  89.28,32.26 270 top
R15  4.7K  [0603-RES]  76.2,38.1 180 top
R16  4.7K  [0603-RES]  76.2,36.83 180 top
R17  1K  [0603-RES]  74.68,40.01 0 top
R18  1K  [0603-RES]  86.11,37.34 180 top
R19  10K  [0603-RES]  17.78,102.74 180 top
R20  0.27  [0603-RES]  31.88,89.41 270 top
R21  4.7K  [0603-RES]  18.8,95.25 180 top
R22  4.7K  [0603-RES]  18.8,93.98 180 top
R23  1K  [0603-RES]  17.27,97.16 0 top
R24  1K  [0603-RES]  28.7,94.49 180 top
R25  10K  [0603-RES]  46.48,102.74 180 top
R26  0.27  [0603-RES]  60.58,89.41 270 top
R27  4.7K  [0603-RES]  47.5,95.25 180 top
R28  4.7K  [0603-RES]  47.5,93.98 180 top
R29  1K  [0603-RES]  45.97,97.16 0 top
R30  1K  [0603-RES]  57.4,94.49 180 top
R31  10K  [0603-RES]  75.18,102.74 180 top
R32  0.27  [0603-RES]  89.28,89.41 270 top
R33  4.7K  [0603-RES]  76.2,95.25 180 top
R34  4.7K  [0603-RES]  76.2,93.98 180 top
R35  1K  [0603-RES]  74.68,97.16 0 top
R36  1K  [0603-RES]  86.11,94.49 180 top
R37  10K  [0603-RES]  17.78,159.89 180 top
R38  0.27  [0603-RES]  31.88,146.56 270 top
R39  4.7K  [0603-RES]  18.8,152.4 180 top
R40  4.7K  [0603-RES]  18.8,151.13 180 top
R41  1K  [0603-RES]  17.27,154.31 0 top
R42  1K  [0603-RES]  28.7,151.64 180 top
R43  10K  [0603-RES]  46.48,159.89 180 top
R44  0.27  [0603-RES]  60.58,146.56 270 top
R45  4.7K  [0603-RES]  47.5,152.4 180 top
R46  4.7K  [0603-RES]  47.5,151.13 180 top
R47  1K  [0603-RES]  45.97,154.31 0 top
R48  1K  [0603-RES]  57.4,151.64 180 top
R49  10K  [0603-RES]  75.18,159.89 180 top
R50  0.27  [0603-RES]  89.28,146.56 270 top
R51  4.7K  [0603-RES]  76.2,152.4 180 top
R52  4.7K  [0603-RES]  76.2,151.13 180 top
R53  1K  [0603-RES]  74.68,154.31 0 top
R54  1K  [0603-RES]  86.11,151.64 180 top
R55  10K  [0603-RES]  17.78,217.04 180 top
R56  0.27  [0603-RES]  31.88,203.71 270 top
R57  4.7K  [0603-RES]  18.8,209.55 180 top
R58  4.7K  [0603-RES]  18.8,208.28 180 top
R59  1K  [0603-RES]  17.27,211.46 0 top
R60  1K  [0603-RES]  28.7,208.79 180 top
R61  10K  [0603-RES]  46.48,217.04 180 top
R62  0.27  [0603-RES]  60.58,203.71 270 top
R63  4.7K  [0603-RES]  47.5,209.55 180 top
R64  4.7K  [0603-RES]  47.5,208.28 180 top
R65  1K  [0603-RES]  45.97,211.46 0 top
R66  1K  [0603-RES]  57.4,208.79 180 top
R67  10K  [0603-RES]  75.18,217.04 180 top
R68  0.27  [0603-RES]  89.28,203.71 270 top
R69  4.7K  [0603-RES]  76.2,209.55 180 top
R70  4.7K  [0603-RES]  76.2,208.28 180 top
R71  1K  [0603-RES]  74.68,211.46 0 top
R72  1K  [0603-RES]  86.11,208.79 180 top
SW1  [TACTILE_SWITCH_SMD_4.6X2.8MM]  23.62,35.31 0 top
SW2  [TACTILE_SWITCH_SMD_4.6X2.8MM]  28.7,41.15 270 top
SW3  [TACTILE_SWITCH_SMD_4.6X2.8MM]  52.32,35.31 0 top
SW4  [TACTILE_SWITCH_SMD_4.6X2.8MM]  57.4,41.15 270 top
SW5  [TACTILE_SWITCH_SMD_4.6X2.8MM]  81.03,35.31 0 top
SW6  [TACTILE_SWITCH_SMD_4.6X2.8MM]  86.11,41.15 270 top
SW7  [TACTILE_SWITCH_SMD_4.6X2.8MM]  23.62,92.46 0 top
SW8  [TACTILE_SWITCH_SMD_4.6X2.8MM]  28.7,98.3 270 top
SW9  [TACTILE_SWITCH_SMD_4.6X2.8MM]  52.32,92.46 0 top
SW10  [TACTILE_SWITCH_SMD_4.6X2.8MM]  57.4,98.3 270 top
SW11  [TACTILE_SWITCH_SMD_4.6X2.8MM]  81.03,92.46 0 top
SW12  [TACTILE_SWITCH_SMD_4.6X2.8MM]  86.11,98.3 270 top
SW13  [TACTILE_SWITCH_SMD_4.6X2.8MM]  23.62,149.61 0 top
SW14  [TACTILE_SWITCH_SMD_4.6X2.8MM]  28.7,155.45 270 top
SW15  [TACTILE_SWITCH_SMD_4.6X2.8MM]  52.32,149.61 0 top
SW16  [TACTILE_SWITCH_SMD_4.6X2.8MM]  57.4,155.45 270 top
SW17  [TACTILE_SWITCH_SMD_4.6X2.8MM]  81.03,149.61 0 top
SW18  [TACTILE_SWITCH_SMD_4.6X2.8MM]  86.11,155.45 270 top
SW19  [TACTILE_SWITCH_SMD_4.6X2.8MM]  23.62,206.76 0 top
SW20  [TACTILE_SWITCH_SMD_4.6X2.8MM]  28.7,212.6 270 top
SW21  [TACTILE_SWITCH_SMD_4.6X2.8MM]  52.32,206.76 0 top
SW22  [TACTILE_SWITCH_SMD_4.6X2.8MM]  57.4,212.6 270 top
SW23  [TACTILE_SWITCH_SMD_4.6X2.8MM]  81.03,206.76 0 top
SW24  [TACTILE_SWITCH_SMD_4.6X2.8MM]  86.11,212.6 270 top
U1  CY8C4146LQI-S422  [QFN-32]  23.62,41.15 0 top
U2  3.3V/150mA  [SOT23-5]  28.7,32.26 270 top
U3  CY8C4146LQI-S422  [QFN-32]  52.32,41.15 0 top
U4  SN74LVC1G66  [SOT23-5]  29.97,19.56 270 top
U5  SN74LVC1G66  [SOT23-5]  29.97,15.75 270 top
U6  3.3V/150mA  [SOT23-5]  57.4,32.26 270 top
U7  SN74LVC1G66  [SOT23-5]  58.67,19.56 270 top
U8  SN74LVC1G66  [SOT23-5]  58.67,15.75 270 top
U9  CY8C4146LQI-S422  [QFN-32]  81.03,41.15 0 top
U10  3.3V/150mA  [SOT23-5]  86.11,32.26 270 top
U11  SN74LVC1G66  [SOT23-5]  87.38,19.56 270 top
U12  SN74LVC1G66  [SOT23-5]  87.38,15.75 270 top
U13  CY8C4146LQI-S422  [QFN-32]  23.62,98.3 0 top
U14  3.3V/150mA  [SOT23-5]  28.7,89.41 270 top
U15  SN74LVC1G66  [SOT23-5]  29.97,76.71 270 top
U16  SN74LVC1G66  [SOT23-5]  29.97,72.9 270 top
U17  CY8C4146LQI-S422  [QFN-32]  52.32,98.3 0 top
U18  3.3V/150mA  [SOT23-5]  57.4,89.41 270 top
U19  SN74LVC1G66  [SOT23-5]  58.67,76.71 270 top
U20  SN74LVC1G66  [SOT23-5]  58.67,72.9 270 top
U21  CY8C4146LQI-S422  [QFN-32]  81.03,98.3 0 top
U22  3.3V/150mA  [SOT23-5]  86.11,89.41 270 top
U23  SN74LVC1G66  [SOT23-5]  87.38,76.71 270 top
U24  SN74LVC1G66  [SOT23-5]  87.38,72.9 270 top
U25  CY8C4146LQI-S422  [QFN-32]  23.62,155.45 0 top
U26  3.3V/150mA  [SOT23-5]  28.7,146.56 270 top
U27  SN74LVC1G66  [SOT23-5]  29.97,133.86 270 top
U28  SN74LVC1G66  [SOT23-5]  29.97,130.05 270 top
U29  CY8C4146LQI-S422  [QFN-32]  52.32,155.45 0 top
U30  3.3V/150mA  [SOT23-5]  57.4,146.56 270 top
U31  SN74LVC1G66  [SOT23-5]  58.67,133.86 270 top
U32  SN74LVC1G66  [SOT23-5]  58.67,130.05 270 top
U33  CY8C4146LQI-S422  [QFN-32]  81.03,155.45 0 top
U34  3.3V/150mA  [SOT23-5]  86.11,146.56 270 top
U35  SN74LVC1G66  [SOT23-5]  87.38,133.86 270 top
U36  SN74LVC1G66  [SOT23-5]  87.38,130.05 270 top
U37  CY8C4146LQI-S422  [QFN-32]  23.62,212.6 0 top
U38  3.3V/150mA  [SOT23-5]  28.7,203.71 270 top
U39  SN74LVC1G66  [SOT23-5]  29.97,191.01 270 top
U40  SN74LVC1G66  [SOT23-5]  29.97,187.2 270 top
U41  CY8C4146LQI-S422  [QFN-32]  52.32,212.6 0 top
U42  3.3V/150mA  [SOT23-5]  57.4,203.71 270 top
U43  SN74LVC1G66  [SOT23-5]  58.67,191.01 270 top
U44  SN74LVC1G66  [SOT23-5]  58.67,187.2 270 top
U45  CY8C4146LQI-S422  [QFN-32]  81.03,212.6 0 top
U46  3.3V/150mA  [SOT23-5]  86.11,203.71 270 top
U47  SN74LVC1G66  [SOT23-5]  87.38,191.01 270 top
U48  SN74LVC1G66  [SOT23-5]  87.38,187.2 270 top
U$1  [SPECTACLE_LOGO_NEGATIVE_1.5X0.5]  44.7,9.4 90 bottom
U$2  [SPECTACLE_LOGO_NEGATIVE_1.5X0.5]  73.41,9.4 90 bottom
U$3  [SPECTACLE_LOGO_NEGATIVE_1.5X0.5]  16,9.4 90 bottom
U$4  [SPECTACLE_LOGO_NEGATIVE_1.5X0.5]  16,66.55 90 bottom
U$5  [SPECTACLE_LOGO_NEGATIVE_1.5X0.5]  44.7,66.55 90 bottom
U$6  [SPECTACLE_LOGO_NEGATIVE_1.5X0.5]  73.41,66.55 90 bottom
U$7  [SPECTACLE_LOGO_NEGATIVE_1.5X0.5]  16,123.7 90 bottom
U$8  [SPECTACLE_LOGO_NEGATIVE_1.5X0.5]  44.7,123.7 90 bottom
U$9  [SPECTACLE_LOGO_NEGATIVE_1.5X0.5]  73.41,123.7 90 bottom
U$10  [SPECTACLE_LOGO_NEGATIVE_1.5X0.5]  16,180.85 90 bottom
U$11  [SPECTACLE_LOGO_NEGATIVE_1.5X0.5]  44.7,180.85 90 bottom
U$12  [SPECTACLE_LOGO_NEGATIVE_1.5X0.5]  73.41,180.85 90 bottom

## Library data of the parts
C1 C5 C7 C13 C17 C21 C25 C29 C33 C37 C41 C45 C49 C53 C57 C61 C65 C69 C73 C77 C81 C85 C89 C93 = SparkFun-Capacitors; PROD_ID: CAP-07888
C2 C8 C18 C26 C34 C42 C50 C58 C66 C74 C82 C90 = SparkFun-Capacitors; PROD_ID: CAP-12417
C3 C4 C6 C9-C12 C14-C16 C19 C20 C22-C24 C27 C28 C30-C32 C35 C36 C38-C40 C43 C44 C46-C48 C51 C52 C54-C56 C59 C60 C62-C64 C67 C68 C70-C72 C75 C76 C78-C80 C83 C84 C86-C88 C91 C92 C94-C96 = SparkFun-Capacitors; PROD_ID: CAP-12416
D1 D4 D8 D9 D13 D14 D18 D19 D23 D24 D28 D29 D33 D34 D38 D39 D43 D44 D48 D49 D53 D54 D58 D59 = SparkFun-DiscreteSemi; PROD_ID: DIO-12501
D2 D6 D11 D16 D21 D26 D31 D36 D41 D46 D51 D56 = SparkFun-LED; PROD_ID: DIO-00819
D3 D7 D12 D17 D22 D27 D32 D37 D42 D47 D52 D57 = SparkFun-LED; PROD_ID: DIO-11230
D5 D10 D15 D20 D25 D30 D35 D40 D45 D50 D55 D60 = SparkFun-DiscreteSemi; PROD_ID: DIO-11623
E$1 = SparkFun-Retired
E$7 E$8 FD1-FD24 LOGO1-LOGO48 U$1-U$12 = SparkFun-Aesthetics
H1-H48 = SparkFun-Electromechanical
J1 J2 J11 J20 J21 J30 J31 J40 J41 J50 J51 J60 J61 J70 J71 J80 J81 J90 J91 J100 J101 J110 J111 J120 = SparkFun-Connectors
J3 J13 J23 J33 J43 J53 J63 J73 J83 J93 J103 J113 = SparkFun-Connectors; PROD_ID: CONN-11752
J4 J10 J12 J19 J22 J29 J32 J39 J42 J49 J52 J59 J62 J69 J72 J79 J82 J89 J92 J99 J102 J109 J112 J119 = SparkFun-Connectors; PROD_ID: CONN-10676; SF_ID: PRT-12639
J5-J9 J14-J18 J24-J28 J34-J38 J44-J48 J54-J58 J64-J68 J74-J78 J84-J88 J94-J98 J104-J108 J114-J118 = SparkFun-Connectors; PROD_ID: CONN-09692
JP1-JP12 = SparkFun-Passives
R1 R7 R13 R19 R25 R31 R37 R43 R49 R55 R61 R67 = SparkFun-Resistors; PROD_ID: RES-00824
R2 R8 R14 R20 R26 R32 R38 R44 R50 R56 R62 R68 = SparkFun-Resistors; PROD_ID: RES-08787
R3 R4 R9 R10 R15 R16 R21 R22 R27 R28 R33 R34 R39 R40 R45 R46 R51 R52 R57 R58 R63 R64 R69 R70 = SparkFun-Resistors; PROD_ID: RES-07857
R5 R6 R11 R12 R17 R18 R23 R24 R29 R30 R35 R36 R41 R42 R47 R48 R53 R54 R59 R60 R65 R66 R71 R72 = SparkFun-Resistors; PROD_ID: RES-07856
SW1-SW24 = SparkFun-Electromechanical; PROD_ID: SWCH-13065
U1 U3 U9 U13 U17 U21 U25 U29 U33 U37 U41 U45 = SparkFun-DigitalIC; PROD_ID: IC-13286
U2 U6 U10 U14 U18 U22 U26 U30 U34 U38 U42 U46 = SparkFun-PowerIC; PROD_ID: VREG-00822
U4 U5 U7 U8 U11 U12 U15 U16 U19 U20 U23 U24 U27 U28 U31 U32 U35 U36 U39 U40 U43 U44 U47 U48 = SparkFun-AnalogIC; PROD_ID: IC-13549

## Nets
3.3V: C2.1 C3.1 J2.1 JP1.2 R1.2 R2.1 R5.2 U1.27 U2.5
3.3V1: C8.1 C11.1 J1.1 JP2.2 R7.2 R8.1 R11.2 U3.27 U6.5
3.3V2: C18.1 C19.1 J21.1 JP3.2 R13.2 R14.1 R17.2 U9.27 U10.5
3.3V3: C26.1 C27.1 J31.1 JP4.2 R19.2 R20.1 R23.2 U13.27 U14.5
3.3V4: C34.1 C35.1 J41.1 JP5.2 R25.2 R26.1 R29.2 U17.27 U18.5
3.3V5: C42.1 C43.1 J51.1 JP6.2 R31.2 R32.1 R35.2 U21.27 U22.5
3.3V6: C50.1 C51.1 J61.1 JP7.2 R37.2 R38.1 R41.2 U25.27 U26.5
3.3V7: C58.1 C59.1 J71.1 JP8.2 R43.2 R44.1 R47.2 U29.27 U30.5
3.3V8: C66.1 C67.1 J81.1 JP9.2 R49.2 R50.1 R53.2 U33.27 U34.5
3.3V9: C74.1 C75.1 J91.1 JP10.2 R55.2 R56.1 R59.2 U37.27 U38.5
3.3V10: C82.1 C83.1 J101.1 JP11.2 R61.2 R62.1 R65.2 U41.27 U42.5
3.3V11: C90.1 C91.1 J111.1 JP12.2 R67.2 R68.1 R71.2 U45.27 U46.5
5V: D5.C J3.VBUS J5.2 J6.2 J7.2 J8.2 J9.2
5V1: D10.C J13.VBUS J14.2 J15.2 J16.2 J17.2 J18.2
5V2: D15.C J23.VBUS J24.2 J25.2 J26.2 J27.2 J28.2
5V3: D20.C J33.VBUS J34.2 J35.2 J36.2 J37.2 J38.2
5V4: D25.C J43.VBUS J44.2 J45.2 J46.2 J47.2 J48.2
5V5: D30.C J53.VBUS J54.2 J55.2 J56.2 J57.2 J58.2
5V6: D35.C J63.VBUS J64.2 J65.2 J66.2 J67.2 J68.2
5V7: D40.C J73.VBUS J74.2 J75.2 J76.2 J77.2 J78.2
5V8: D45.C J83.VBUS J84.2 J85.2 J86.2 J87.2 J88.2
5V9: D50.C J93.VBUS J94.2 J95.2 J96.2 J97.2 J98.2
5V10: D55.C J103.VBUS J104.2 J105.2 J106.2 J107.2 J108.2
5V11: D60.C J113.VBUS J114.2 J115.2 J116.2 J117.2 J118.2
BTN: SW2.1 U1.13
BTN1: SW4.1 U3.13
BTN2: SW6.1 U9.13
BTN3: SW8.1 U13.13
BTN4: SW10.1 U17.13
BTN5: SW12.1 U21.13
BTN6: SW14.1 U25.13
BTN7: SW16.1 U29.13
BTN8: SW18.1 U33.13
BTN9: SW20.1 U37.13
BTN10: SW22.1 U41.13
BTN11: SW24.1 U45.13
GND: C1.2 C2.2 C3.2 C4.2 C5.2 C6.2 C9.2 C10.2 D1.3 D2.C D3.C D4.3 J2.2 J3.GND J4.TIP J5.1 J6.1 J7.1 J8.1 J9.1 J10.TIP J11.5 J11.6 SW1.3 SW2.3 U1.26 U1.28 U1.EP U2.2 U4.3 U5.3
GND1: C7.2 C8.2 C11.2 C12.2 C13.2 C14.2 C15.2 C16.2 D6.C D7.C D8.3 D9.3 J1.2 J12.TIP J13.GND J14.1 J15.1 J16.1 J17.1 J18.1 J19.TIP J20.5 J20.6 SW3.3 SW4.3 U3.26 U3.28 U3.EP U6.2 U7.3 U8.3
GND2: C17.2 C18.2 C19.2 C20.2 C21.2 C22.2 C23.2 C24.2 D11.C D12.C D13.3 D14.3 J21.2 J22.TIP J23.GND J24.1 J25.1 J26.1 J27.1 J28.1 J29.TIP J30.5 J30.6 SW5.3 SW6.3 U9.26 U9.28 U9.EP U10.2 U11.3 U12.3
GND3: C25.2 C26.2 C27.2 C28.2 C29.2 C30.2 C31.2 C32.2 D16.C D17.C D18.3 D19.3 J31.2 J32.TIP J33.GND J34.1 J35.1 J36.1 J37.1 J38.1 J39.TIP J40.5 J40.6 SW7.3 SW8.3 U13.26 U13.28 U13.EP U14.2 U15.3 U16.3
GND4: C33.2 C34.2 C35.2 C36.2 C37.2 C38.2 C39.2 C40.2 D21.C D22.C D23.3 D24.3 J41.2 J42.TIP J43.GND J44.1 J45.1 J46.1 J47.1 J48.1 J49.TIP J50.5 J50.6 SW9.3 SW10.3 U17.26 U17.28 U17.EP U18.2 U19.3 U20.3
GND5: C41.2 C42.2 C43.2 C44.2 C45.2 C46.2 C47.2 C48.2 D26.C D27.C D28.3 D29.3 J51.2 J52.TIP J53.GND J54.1 J55.1 J56.1 J57.1 J58.1 J59.TIP J60.5 J60.6 SW11.3 SW12.3 U21.26 U21.28 U21.EP U22.2 U23.3 U24.3
GND6: C49.2 C50.2 C51.2 C52.2 C53.2 C54.2 C55.2 C56.2 D31.C D32.C D33.3 D34.3 J61.2 J62.TIP J63.GND J64.1 J65.1 J66.1 J67.1 J68.1 J69.TIP J70.5 J70.6 SW13.3 SW14.3 U25.26 U25.28 U25.EP U26.2 U27.3 U28.3
GND7: C57.2 C58.2 C59.2 C60.2 C61.2 C62.2 C63.2 C64.2 D36.C D37.C D38.3 D39.3 J71.2 J72.TIP J73.GND J74.1 J75.1 J76.1 J77.1 J78.1 J79.TIP J80.5 J80.6 SW15.3 SW16.3 U29.26 U29.28 U29.EP U30.2 U31.3 U32.3
GND8: C65.2 C66.2 C67.2 C68.2 C69.2 C70.2 C71.2 C72.2 D41.C D42.C D43.3 D44.3 J81.2 J82.TIP J83.GND J84.1 J85.1 J86.1 J87.1 J88.1 J89.TIP J90.5 J90.6 SW17.3 SW18.3 U33.26 U33.28 U33.EP U34.2 U35.3 U36.3
GND9: C73.2 C74.2 C75.2 C76.2 C77.2 C78.2 C79.2 C80.2 D46.C D47.C D48.3 D49.3 J91.2 J92.TIP J93.GND J94.1 J95.1 J96.1 J97.1 J98.1 J99.TIP J100.5 J100.6 SW19.3 SW20.3 U37.26 U37.28 U37.EP U38.2 U39.3 U40.3
GND10: C81.2 C82.2 C83.2 C84.2 C85.2 C86.2 C87.2 C88.2 D51.C D52.C D53.3 D54.3 J101.2 J102.TIP J103.GND J104.1 J105.1 J106.1 J107.1 J108.1 J109.TIP J110.5 J110.6 SW21.3 SW22.3 U41.26 U41.28 U41.EP U42.2 U43.3 U44.3
GND11: C89.2 C90.2 C91.2 C92.2 C93.2 C94.2 C95.2 C96.2 D56.C D57.C D58.3 D59.3 J111.2 J112.TIP J113.GND J114.1 J115.1 J116.1 J117.1 J118.1 J119.TIP J120.5 J120.6 SW23.3 SW24.3 U45.26 U45.28 U45.EP U46.2 U47.3 U48.3
I2C_OUT_EN: U1.4 U4.4 U5.4
I2C_OUT_EN1: U3.4 U7.4 U8.4
I2C_OUT_EN2: U9.4 U11.4 U12.4
I2C_OUT_EN3: U13.4 U15.4 U16.4
I2C_OUT_EN4: U17.4 U19.4 U20.4
I2C_OUT_EN5: U21.4 U23.4 U24.4
I2C_OUT_EN6: U25.4 U27.4 U28.4
I2C_OUT_EN7: U29.4 U31.4 U32.4
I2C_OUT_EN8: U33.4 U35.4 U36.4
I2C_OUT_EN9: U37.4 U39.4 U40.4
I2C_OUT_EN10: U41.4 U43.4 U44.4
I2C_OUT_EN11: U45.4 U47.4 U48.4
ISO_POUR: J3.SHIELD1 J3.SHIELD2 J3.SHIELD3
ISO_POUR1: J13.SHIELD1 J13.SHIELD2 J13.SHIELD3
ISO_POUR2: J23.SHIELD1 J23.SHIELD2 J23.SHIELD3
ISO_POUR3: J33.SHIELD1 J33.SHIELD2 J33.SHIELD3
ISO_POUR4: J43.SHIELD1 J43.SHIELD2 J43.SHIELD3
ISO_POUR5: J53.SHIELD1 J53.SHIELD2 J53.SHIELD3
ISO_POUR6: J63.SHIELD1 J63.SHIELD2 J63.SHIELD3
ISO_POUR7: J73.SHIELD1 J73.SHIELD2 J73.SHIELD3
ISO_POUR8: J83.SHIELD1 J83.SHIELD2 J83.SHIELD3
ISO_POUR9: J93.SHIELD1 J93.SHIELD2 J93.SHIELD3
ISO_POUR10: J103.SHIELD1 J103.SHIELD2 J103.SHIELD3
ISO_POUR11: J113.SHIELD1 J113.SHIELD2 J113.SHIELD3
LED: R6.2 U1.8
LED1: R12.2 U3.8
LED2: R18.2 U9.8
LED3: R24.2 U13.8
LED4: R30.2 U17.8
LED5: R36.2 U21.8
LED6: R42.2 U25.8
LED7: R48.2 U29.8
LED8: R54.2 U33.8
LED9: R60.2 U37.8
LED10: R66.2 U41.8
LED11: R72.2 U45.8
N$2: JP1.3 R3.2
N$3: C1.1 R2.2
N$4: D2.A R5.1
N$5: D3.A R6.1
N$6: JP1.1 R4.2
N$18: C7.1 R8.2
N$25: JP2.3 R9.2
N$26: JP2.1 R10.2
N$27: D6.A R11.1
N$28: D7.A R12.1
N$47: C17.1 R14.2
N$48: JP3.3 R15.2
N$49: JP3.1 R16.2
N$50: D11.A R17.1
N$51: D12.A R18.1
N$70: C25.1 R20.2
N$71: JP4.3 R21.2
N$72: JP4.1 R22.2
N$73: D16.A R23.1
N$74: D17.A R24.1
N$93: C33.1 R26.2
N$94: JP5.3 R27.2
N$95: JP5.1 R28.2
N$96: D21.A R29.1
N$97: D22.A R30.1
N$116: C41.1 R32.2
N$117: JP6.3 R33.2
N$118: JP6.1 R34.2
N$119: D26.A R35.1
N$120: D27.A R36.1
N$139: C49.1 R38.2
N$140: JP7.3 R39.2
N$141: JP7.1 R40.2
N$142: D31.A R41.1
N$143: D32.A R42.1
N$162: C57.1 R44.2
N$163: JP8.3 R45.2
N$164: JP8.1 R46.2
N$165: D36.A R47.1
N$166: D37.A R48.1
N$185: C65.1 R50.2
N$186: JP9.3 R51.2
N$187: JP9.1 R52.2
N$188: D41.A R53.1
N$189: D42.A R54.1
N$208: C73.1 R56.2
N$209: JP10.3 R57.2
N$210: JP10.1 R58.2
N$211: D46.A R59.1
N$212: D47.A R60.1
N$231: C81.1 R62.2
N$232: JP11.3 R63.2
N$233: JP11.1 R64.2
N$234: D51.A R65.1
N$235: D52.A R66.1
N$254: C89.1 R68.2
N$255: JP12.3 R69.2
N$256: JP12.1 R70.2
N$257: D56.A R71.1
N$258: D57.A R72.1
RXI: J11.3 U1.21
RXI1: J20.3 U3.21
RXI2: J30.3 U9.21
RXI3: J40.3 U13.21
RXI4: J50.3 U17.21
RXI5: J60.3 U21.21
RXI6: J70.3 U25.21
RXI7: J80.3 U29.21
RXI8: J90.3 U33.21
RXI9: J100.3 U37.21
RXI10: J110.3 U41.21
RXI11: J120.3 U45.21
SCL: D4.1 J4.RING2 R3.1 U1.17 U4.1
SCL1: D8.1 J12.RING2 R9.1 U3.17 U7.1
SCL2: D13.1 J22.RING2 R15.1 U9.17 U11.1
SCL3: D18.1 J32.RING2 R21.1 U13.17 U15.1
SCL4: D23.1 J42.RING2 R27.1 U17.17 U19.1
SCL5: D28.1 J52.RING2 R33.1 U21.17 U23.1
SCL6: D33.1 J62.RING2 R39.1 U25.17 U27.1
SCL7: D38.1 J72.RING2 R45.1 U29.17 U31.1
SCL8: D43.1 J82.RING2 R51.1 U33.17 U35.1
SCL9: D48.1 J92.RING2 R57.1 U37.17 U39.1
SCL10: D53.1 J102.RING2 R63.1 U41.17 U43.1
SCL11: D58.1 J112.RING2 R69.1 U45.17 U47.1
SCL_OUT: J10.RING2 U4.2
SCL_OUT1: J19.RING2 U7.2
SCL_OUT2: J29.RING2 U11.2
SCL_OUT3: J39.RING2 U15.2
SCL_OUT4: J49.RING2 U19.2
SCL_OUT5: J59.RING2 U23.2
SCL_OUT6: J69.RING2 U27.2
SCL_OUT7: J79.RING2 U31.2
SCL_OUT8: J89.RING2 U35.2
SCL_OUT9: J99.RING2 U39.2
SCL_OUT10: J109.RING2 U43.2
SCL_OUT11: J119.RING2 U47.2
SDA: D4.2 J4.RING1 R4.1 U1.18 U5.1
SDA1: D8.2 J12.RING1 R10.1 U3.18 U8.1
SDA2: D13.2 J22.RING1 R16.1 U9.18 U12.1
SDA3: D18.2 J32.RING1 R22.1 U13.18 U16.1
SDA4: D23.2 J42.RING1 R28.1 U17.18 U20.1
SDA5: D28.2 J52.RING1 R34.1 U21.18 U24.1
SDA6: D33.2 J62.RING1 R40.1 U25.18 U28.1
SDA7: D38.2 J72.RING1 R46.1 U29.18 U32.1
SDA8: D43.2 J82.RING1 R52.1 U33.18 U36.1
SDA9: D48.2 J92.RING1 R58.1 U37.18 U40.1
SDA10: D53.2 J102.RING1 R64.1 U41.18 U44.1
SDA11: D58.2 J112.RING1 R70.1 U45.18 U48.1
SDA_OUT: J10.RING1 U5.2
SDA_OUT1: J19.RING1 U8.2
SDA_OUT2: J29.RING1 U12.2
SDA_OUT3: J39.RING1 U16.2
SDA_OUT4: J49.RING1 U20.2
SDA_OUT5: J59.RING1 U24.2
SDA_OUT6: J69.RING1 U28.2
SDA_OUT7: J79.RING1 U32.2
SDA_OUT8: J89.RING1 U36.2
SDA_OUT9: J99.RING1 U40.2
SDA_OUT10: J109.RING1 U44.2
SDA_OUT11: J119.RING1 U48.2
SERVO_0: J5.3 U1.9
SERVO_1: J6.3 U1.7
SERVO_2: J7.3 U1.29
SERVO_3: J8.3 U1.31
SERVO_4: J9.3 U1.2
SERVO_5: J14.3 U3.9
SERVO_6: J15.3 U3.7
SERVO_7: J16.3 U3.29
SERVO_8: J17.3 U3.31
SERVO_9: J18.3 U3.2
SERVO_10: J24.3 U9.9
SERVO_11: J25.3 U9.7
SERVO_12: J26.3 U9.29
SERVO_13: J27.3 U9.31
SERVO_14: J28.3 U9.2
SERVO_15: J34.3 U13.9
SERVO_16: J35.3 U13.7
SERVO_17: J36.3 U13.29
SERVO_18: J37.3 U13.31
SERVO_19: J38.3 U13.2
SERVO_20: J44.3 U17.9
SERVO_21: J45.3 U17.7
SERVO_22: J46.3 U17.29
SERVO_23: J47.3 U17.31
SERVO_24: J48.3 U17.2
SERVO_25: J54.3 U21.9
SERVO_26: J55.3 U21.7
SERVO_27: J56.3 U21.29
SERVO_28: J57.3 U21.31
SERVO_29: J58.3 U21.2
SERVO_30: J64.3 U25.9
SERVO_31: J65.3 U25.7
SERVO_32: J66.3 U25.29
SERVO_33: J67.3 U25.31
SERVO_34: J68.3 U25.2
SERVO_35: J74.3 U29.9
SERVO_36: J75.3 U29.7
SERVO_37: J76.3 U29.29
SERVO_38: J77.3 U29.31
SERVO_39: J78.3 U29.2
SERVO_40: J84.3 U33.9
SERVO_41: J85.3 U33.7
SERVO_42: J86.3 U33.29
SERVO_43: J87.3 U33.31
SERVO_44: J88.3 U33.2
SERVO_45: J94.3 U37.9
SERVO_46: J95.3 U37.7
SERVO_47: J96.3 U37.29
SERVO_48: J97.3 U37.31
SERVO_49: J98.3 U37.2
SERVO_50: J104.3 U41.9
SERVO_51: J105.3 U41.7
SERVO_52: J106.3 U41.29
SERVO_53: J107.3 U41.31
SERVO_54: J108.3 U41.2
SERVO_55: J114.3 U45.9
SERVO_56: J115.3 U45.7
SERVO_57: J116.3 U45.29
SERVO_58: J117.3 U45.31
SERVO_59: J118.3 U45.2
SWD_CLK: J2.4 U1.12
SWD_CLK1: J1.4 U3.12
SWD_CLK2: J21.4 U9.12
SWD_CLK3: J31.4 U13.12
SWD_CLK4: J41.4 U17.12
SWD_CLK5: J51.4 U21.12
SWD_CLK6: J61.4 U25.12
SWD_CLK7: J71.4 U29.12
SWD_CLK8: J81.4 U33.12
SWD_CLK9: J91.4 U37.12
SWD_CLK10: J101.4 U41.12
SWD_CLK11: J111.4 U45.12
SWD_DATA: J2.5 U1.11
SWD_DATA1: J1.5 U3.11
SWD_DATA2: J21.5 U9.11
SWD_DATA3: J31.5 U13.11
SWD_DATA4: J41.5 U17.11
SWD_DATA5: J51.5 U21.11
SWD_DATA6: J61.5 U25.11
SWD_DATA7: J71.5 U29.11
SWD_DATA8: J81.5 U33.11
SWD_DATA9: J91.5 U37.11
SWD_DATA10: J101.5 U41.11
SWD_DATA11: J111.5 U45.11
TXO: J11.2 U1.22
TXO1: J20.2 U3.22
TXO2: J30.2 U9.22
TXO3: J40.2 U13.22
TXO4: J50.2 U17.22
TXO5: J60.2 U21.22
TXO6: J70.2 U25.22
TXO7: J80.2 U29.22
TXO8: J90.2 U33.22
TXO9: J100.2 U37.22
TXO10: J110.2 U41.22
TXO11: J120.2 U45.22
VCC: C4.1 U1.25
VCC1: C12.1 U3.25
VCC2: C20.1 U9.25
VCC3: C28.1 U13.25
VCC4: C36.1 U17.25
VCC5: C44.1 U21.25
VCC6: C52.1 U25.25
VCC7: C60.1 U29.25
VCC8: C68.1 U33.25
VCC9: C76.1 U37.25
VCC10: C84.1 U41.25
VCC11: C92.1 U45.25
VIN: C5.1 C6.1 C9.1 C10.1 D1.2 D5.A J4.EARTH J10.EARTH U2.1 U2.3 U4.5 U5.5
VIN1: C13.1 C14.1 C15.1 C16.1 D9.2 D10.A J12.EARTH J19.EARTH U6.1 U6.3 U7.5 U8.5
VIN2: C21.1 C22.1 C23.1 C24.1 D14.2 D15.A J22.EARTH J29.EARTH U10.1 U10.3 U11.5 U12.5
VIN3: C29.1 C30.1 C31.1 C32.1 D19.2 D20.A J32.EARTH J39.EARTH U14.1 U14.3 U15.5 U16.5
VIN4: C37.1 C38.1 C39.1 C40.1 D24.2 D25.A J42.EARTH J49.EARTH U18.1 U18.3 U19.5 U20.5
VIN5: C45.1 C46.1 C47.1 C48.1 D29.2 D30.A J52.EARTH J59.EARTH U22.1 U22.3 U23.5 U24.5
VIN6: C53.1 C54.1 C55.1 C56.1 D34.2 D35.A J62.EARTH J69.EARTH U26.1 U26.3 U27.5 U28.5
VIN7: C61.1 C62.1 C63.1 C64.1 D39.2 D40.A J72.EARTH J79.EARTH U30.1 U30.3 U31.5 U32.5
VIN8: C69.1 C70.1 C71.1 C72.1 D44.2 D45.A J82.EARTH J89.EARTH U34.1 U34.3 U35.5 U36.5
VIN9: C77.1 C78.1 C79.1 C80.1 D49.2 D50.A J92.EARTH J99.EARTH U38.1 U38.3 U39.5 U40.5
VIN10: C85.1 C86.1 C87.1 C88.1 D54.2 D55.A J102.EARTH J109.EARTH U42.1 U42.3 U43.5 U44.5
VIN11: C93.1 C94.1 C95.1 C96.1 D59.2 D60.A J112.EARTH J119.EARTH U46.1 U46.3 U47.5 U48.5
XRES: J2.3 R1.1 SW1.1 U1.24
XRES1: J1.3 R7.1 SW3.1 U3.24
XRES2: J21.3 R13.1 SW5.1 U9.24
XRES3: J31.3 R19.1 SW7.1 U13.24
XRES4: J41.3 R25.1 SW9.1 U17.24
XRES5: J51.3 R31.1 SW11.1 U21.24
XRES6: J61.3 R37.1 SW13.1 U25.24
XRES7: J71.3 R43.1 SW15.1 U29.24
XRES8: J81.3 R49.1 SW17.1 U33.24
XRES9: J91.3 R55.1 SW19.1 U37.24
XRES10: J101.3 R61.1 SW21.1 U41.24
XRES11: J111.3 R67.1 SW23.1 U45.24

## Tracks (layer width: path | path; a pad name or v marks a point on that pad's centre or on a via)
3.3V  (via drill 0.25)
  Top 0.203: 20.2,41.9 20.19,41.91 | JP1.2 v14.49,37.47 | R1.2 v15.75,45.59
  Top 0.254: U1.27 20.2,41.9
  Top 0.406: R2.1 31.03,33.11 30.93,33.21 U2.5 30,32.48 v30.23,32.26 | C3.1 20.07,42.55 20.19,42.42 v20.19,42.04 20.19,41.91 20.19,41.66 19.94,41.4 C2.1 19.12,40.2 18.92,40.01 R5.2
  pour Route15: 33.78,6.86 10.92,6.86 arc-90 9.65,8.13 9.65,61.47 arc-90 10.92,62.74 33.78,62.74 arc-90 35.05,61.47 35.05,8.13 arc-90
3.3V1  (via drill 0.25)
  Top 0.203: 48.91,41.9 48.9,41.91 | JP2.2 v43.19,37.47 | R7.2 v44.45,45.59
  Top 0.254: U3.27 48.91,41.9
  Top 0.406: R8.1 59.73,33.11 59.63,33.21 U6.5 58.7,32.48 v58.93,32.26 | C11.1 48.77,42.55 48.9,42.42 v48.9,42.04 48.9,41.91 48.9,41.66 48.64,41.4 C8.1 47.82,40.2 47.62,40.01 R11.2
  pour Route15: 62.48,6.86 39.62,6.86 arc-90 38.35,8.13 38.35,61.47 arc-90 39.62,62.74 62.48,62.74 arc-90 63.75,61.47 63.75,8.13 arc-90
3.3V2  (via drill 0.25)
  Top 0.203: 77.61,41.9 77.6,41.91 | JP3.2 v71.89,37.47 | R13.2 v73.15,45.59
  Top 0.254: U9.27 77.61,41.9
  Top 0.406: R14.1 88.43,33.11 88.33,33.21 U10.5 87.41,32.48 v87.63,32.26 | C19.1 77.47,42.55 77.6,42.42 v77.6,42.04 77.6,41.91 77.6,41.66 77.34,41.4 C18.1 76.53,40.2 76.33,40.01 R17.2
  pour Route15: 91.19,6.86 68.33,6.86 arc-90 67.06,8.13 67.06,61.47 arc-90 68.33,62.74 91.19,62.74 arc-90 92.46,61.47 92.46,8.13 arc-90
3.3V3  (via drill 0.25)
  Top 0.203: 20.2,99.05 20.19,99.06 | JP4.2 v14.49,94.61 | R19.2 v15.75,102.74
  Top 0.254: U13.27 20.2,99.05
  Top 0.406: R20.1 31.03,90.26 30.93,90.36 U14.5 30,89.63 v30.23,89.41 | C27.1 20.07,99.69 20.19,99.57 v20.19,99.19 20.19,99.06 20.19,98.81 19.94,98.55 C26.1 19.12,97.35 18.92,97.16 R23.2
  pour Route15: 33.78,64.01 10.92,64.01 arc-90 9.65,65.28 9.65,118.62 arc-90 10.92,119.89 33.78,119.89 arc-90 35.05,118.62 35.05,65.28 arc-90
3.3V4  (via drill 0.25)
  Top 0.203: 48.91,99.05 48.9,99.06 | JP5.2 v43.19,94.61 | R25.2 v44.45,102.74
  Top 0.254: U17.27 48.91,99.05
  Top 0.406: R26.1 59.73,90.26 59.63,90.36 U18.5 58.7,89.63 v58.93,89.41 | C35.1 48.77,99.69 48.9,99.57 v48.9,99.19 48.9,99.06 48.9,98.81 48.64,98.55 C34.1 47.82,97.35 47.62,97.16 R29.2
  pour Route15: 62.48,64.01 39.62,64.01 arc-90 38.35,65.28 38.35,118.62 arc-90 39.62,119.89 62.48,119.89 arc-90 63.75,118.62 63.75,65.28 arc-90
3.3V5  (via drill 0.25)
  Top 0.203: 77.61,99.05 77.6,99.06 | JP6.2 v71.89,94.61 | R31.2 v73.15,102.74
  Top 0.254: U21.27 77.61,99.05
  Top 0.406: R32.1 88.43,90.26 88.33,90.36 U22.5 87.41,89.63 v87.63,89.41 | C43.1 77.47,99.69 77.6,99.57 v77.6,99.19 77.6,99.06 77.6,98.81 77.34,98.55 C42.1 76.53,97.35 76.33,97.16 R35.2
  pour Route15: 91.19,64.01 68.33,64.01 arc-90 67.06,65.28 67.06,118.62 arc-90 68.33,119.89 91.19,119.89 arc-90 92.46,118.62 92.46,65.28 arc-90
3.3V6  (via drill 0.25)
  Top 0.203: 20.2,156.2 20.19,156.21 | JP7.2 v14.49,151.76 | R37.2 v15.75,159.89
  Top 0.254: U25.27 20.2,156.2
  Top 0.406: R38.1 31.03,147.41 30.93,147.51 U26.5 30,146.78 v30.23,146.56 | C51.1 20.07,156.84 20.19,156.72 v20.19,156.34 20.19,156.21 20.19,155.96 19.94,155.7 C50.1 19.12,154.5 18.92,154.31 R41.2
  pour Route15: 33.78,121.16 10.92,121.16 arc-90 9.65,122.43 9.65,175.77 arc-90 10.92,177.04 33.78,177.04 arc-90 35.05,175.77 35.05,122.43 arc-90
3.3V7  (via drill 0.25)
  Top 0.203: 48.91,156.2 48.9,156.21 | JP8.2 v43.19,151.76 | R43.2 v44.45,159.89
  Top 0.254: U29.27 48.91,156.2
  Top 0.406: R44.1 59.73,147.41 59.63,147.51 U30.5 58.7,146.78 v58.93,146.56 | C59.1 48.77,156.84 48.9,156.72 v48.9,156.34 48.9,156.21 48.9,155.96 48.64,155.7 C58.1 47.82,154.5 47.62,154.31 R47.2
  pour Route15: 62.48,121.16 39.62,121.16 arc-90 38.35,122.43 38.35,175.77 arc-90 39.62,177.04 62.48,177.04 arc-90 63.75,175.77 63.75,122.43 arc-90
3.3V8  (via drill 0.25)
  Top 0.203: 77.61,156.2 77.6,156.21 | JP9.2 v71.89,151.76 | R49.2 v73.15,159.89
  Top 0.254: U33.27 77.61,156.2
  Top 0.406: R50.1 88.43,147.41 88.33,147.51 U34.5 87.41,146.78 v87.63,146.56 | C67.1 77.47,156.84 77.6,156.72 v77.6,156.34 77.6,156.21 77.6,155.96 77.34,155.7 C66.1 76.53,154.5 76.33,154.31 R53.2
  pour Route15: 91.19,121.16 68.33,121.16 arc-90 67.06,122.43 67.06,175.77 arc-90 68.33,177.04 91.19,177.04 arc-90 92.46,175.77 92.46,122.43 arc-90
3.3V9  (via drill 0.25)
  Top 0.203: 20.2,213.35 20.19,213.36 | JP10.2 v14.49,208.91 | R55.2 v15.75,217.04
  Top 0.254: U37.27 20.2,213.35